# Altium PCB Transfomer_fully-interleaved-type2.PcbDoc (part 1 of 2)
Units mm, origin at the board's own origin, x right, y up, seen from the top; angles counter-clockwise.
Board outline 177 x 117 mm, 6 copper layers (Top Layer, Mid-Layer 1, Mid-Layer 2, Mid-Layer 3, Mid-Layer 4, Bottom Layer); 9 components, 18 nets, 68 pads, 510 vias.
Unrouted connection lines stored in the file: 8.
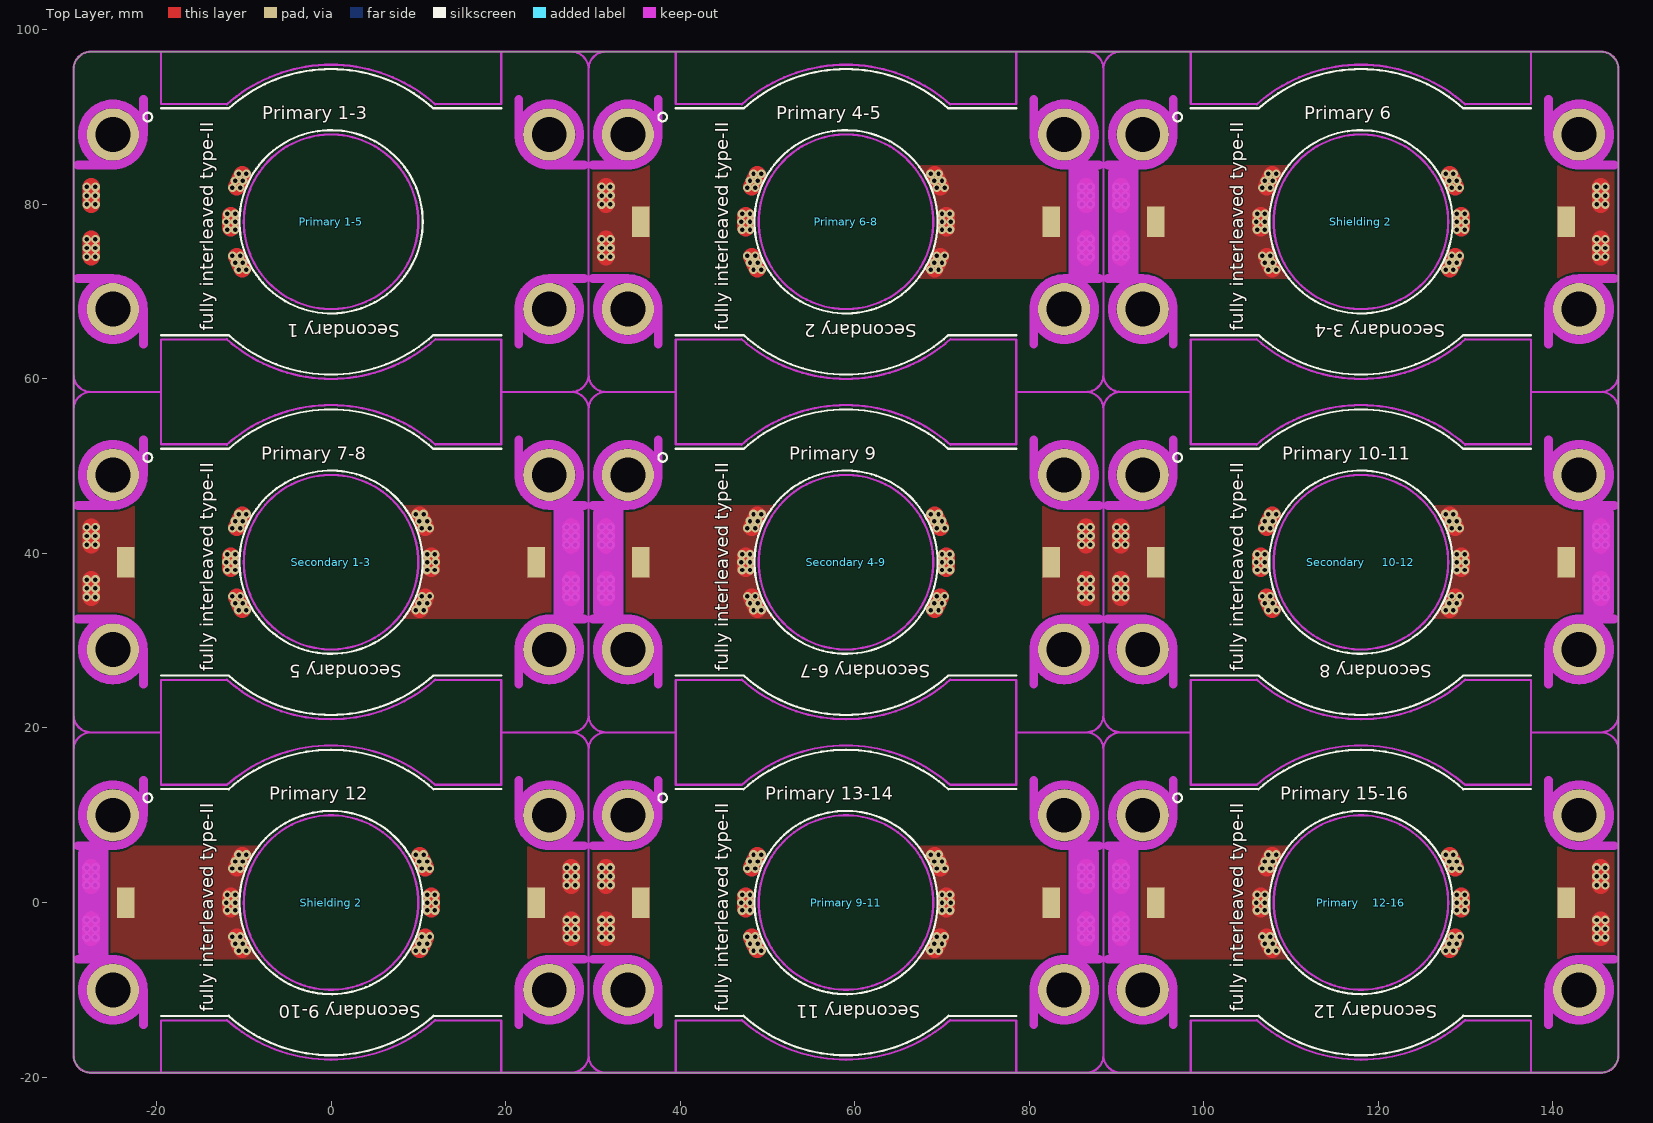
[diagram p0: Top Layer view]
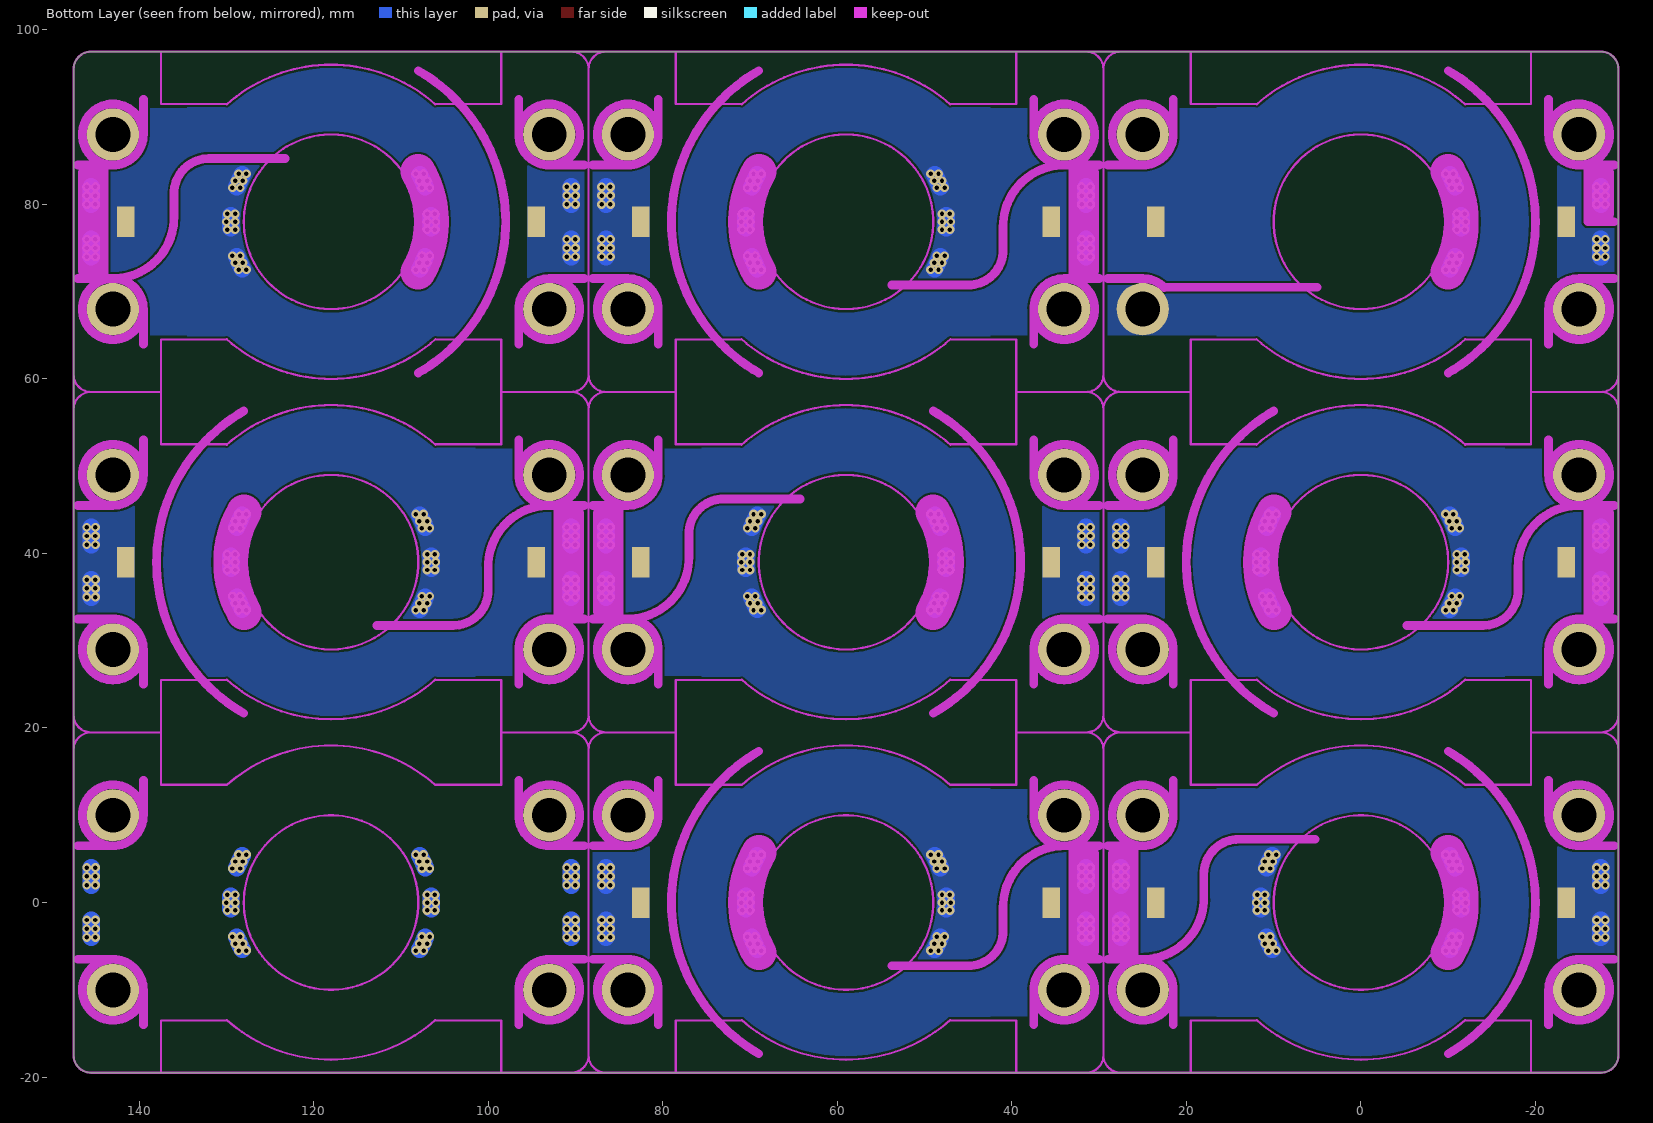
[diagram p1: Bottom Layer view, seen from below]
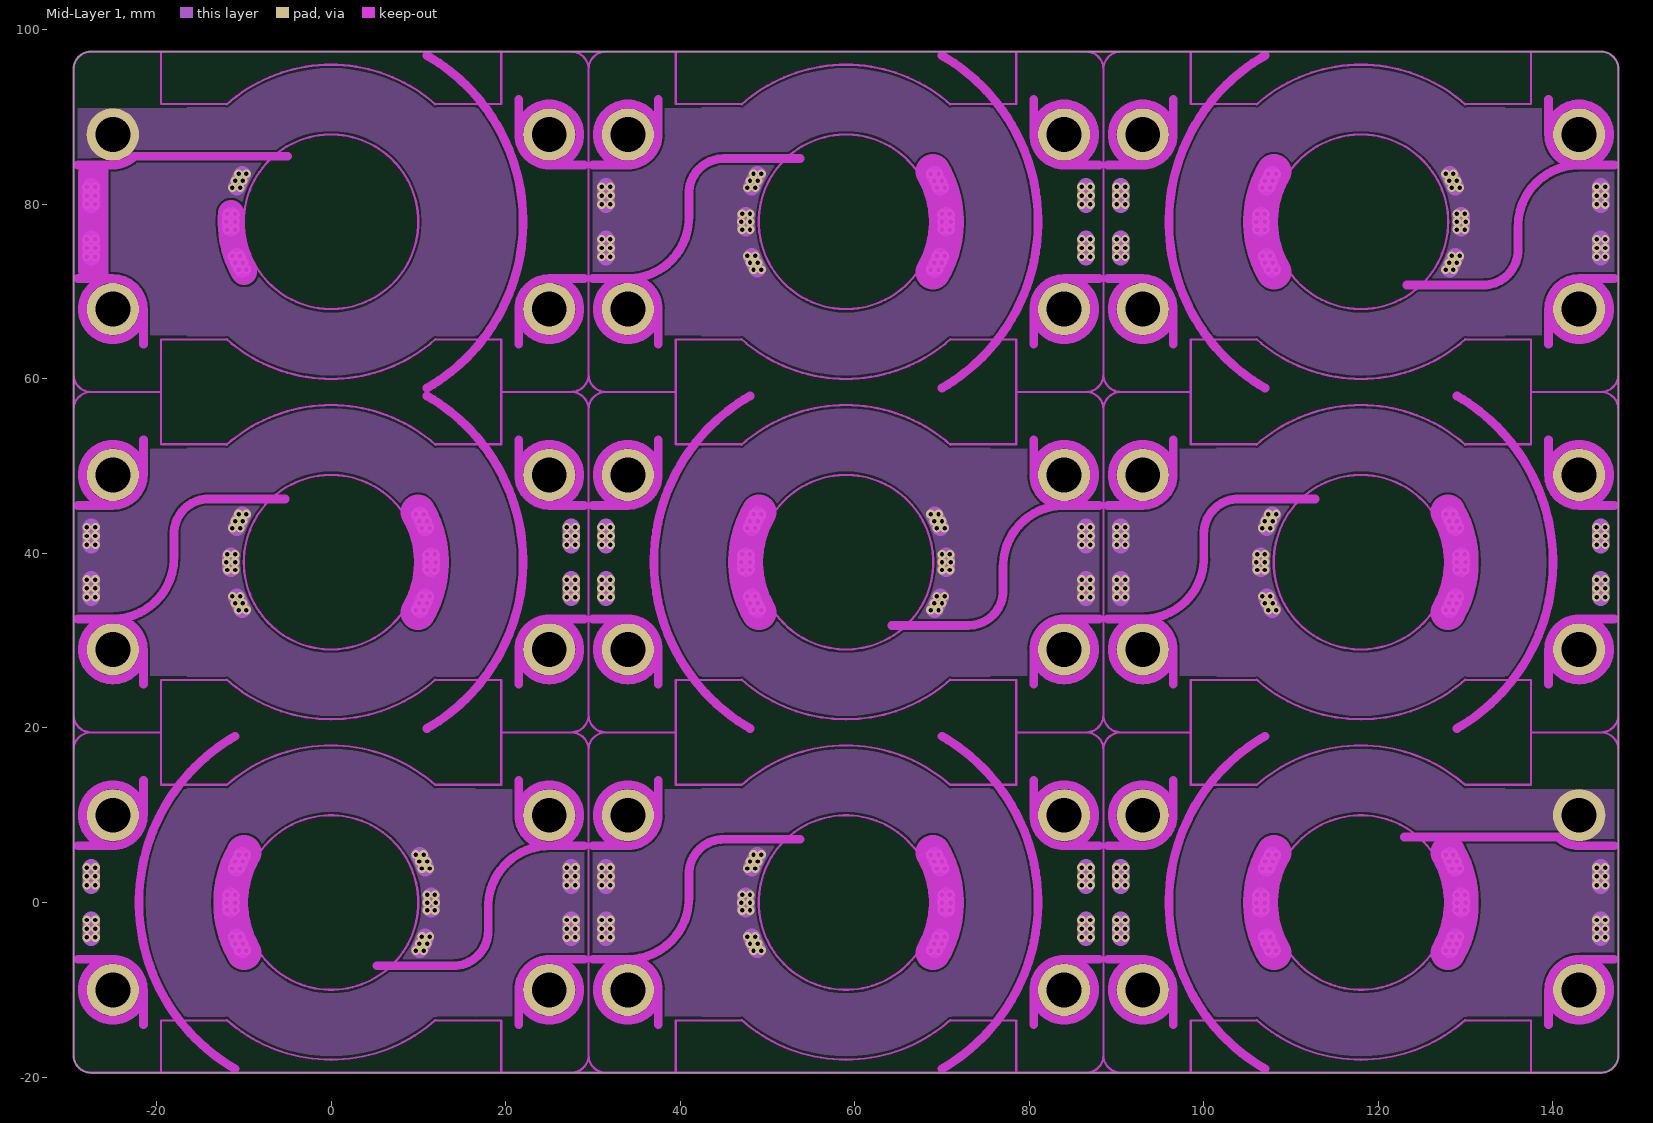
[diagram p2: Mid-Layer 1]
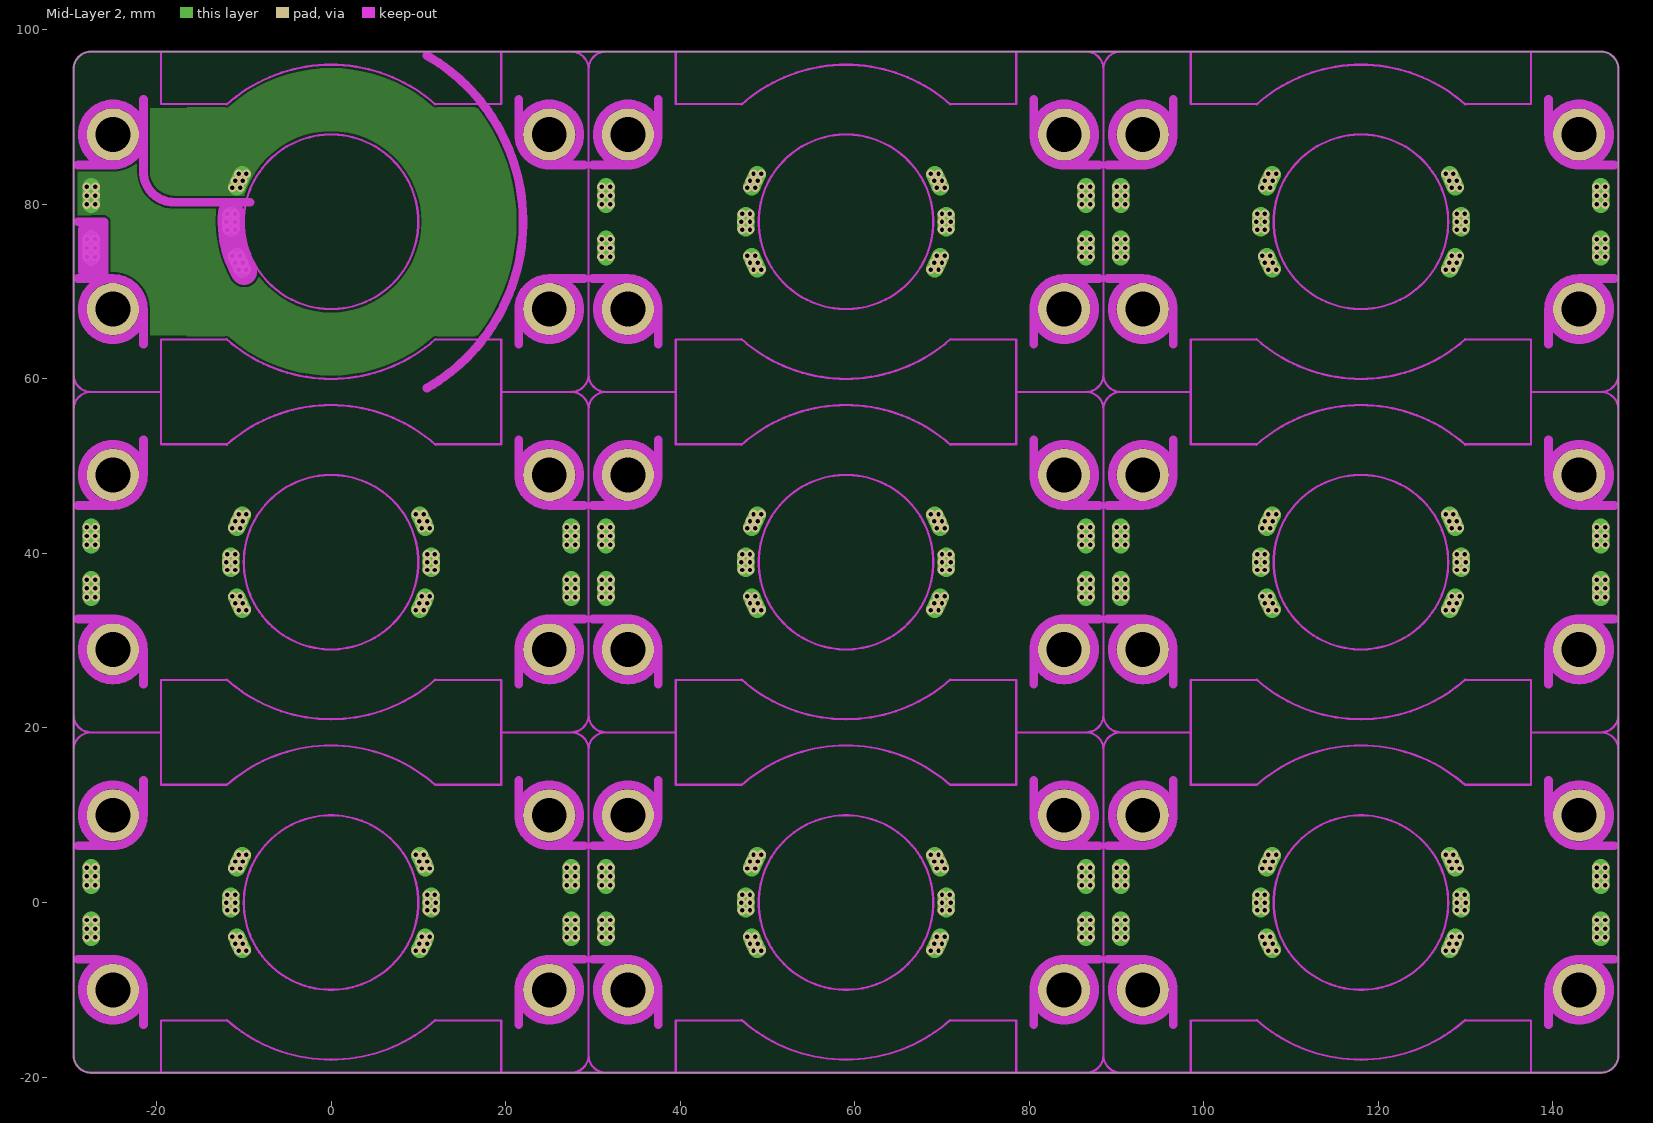
[diagram p3: Mid-Layer 2]
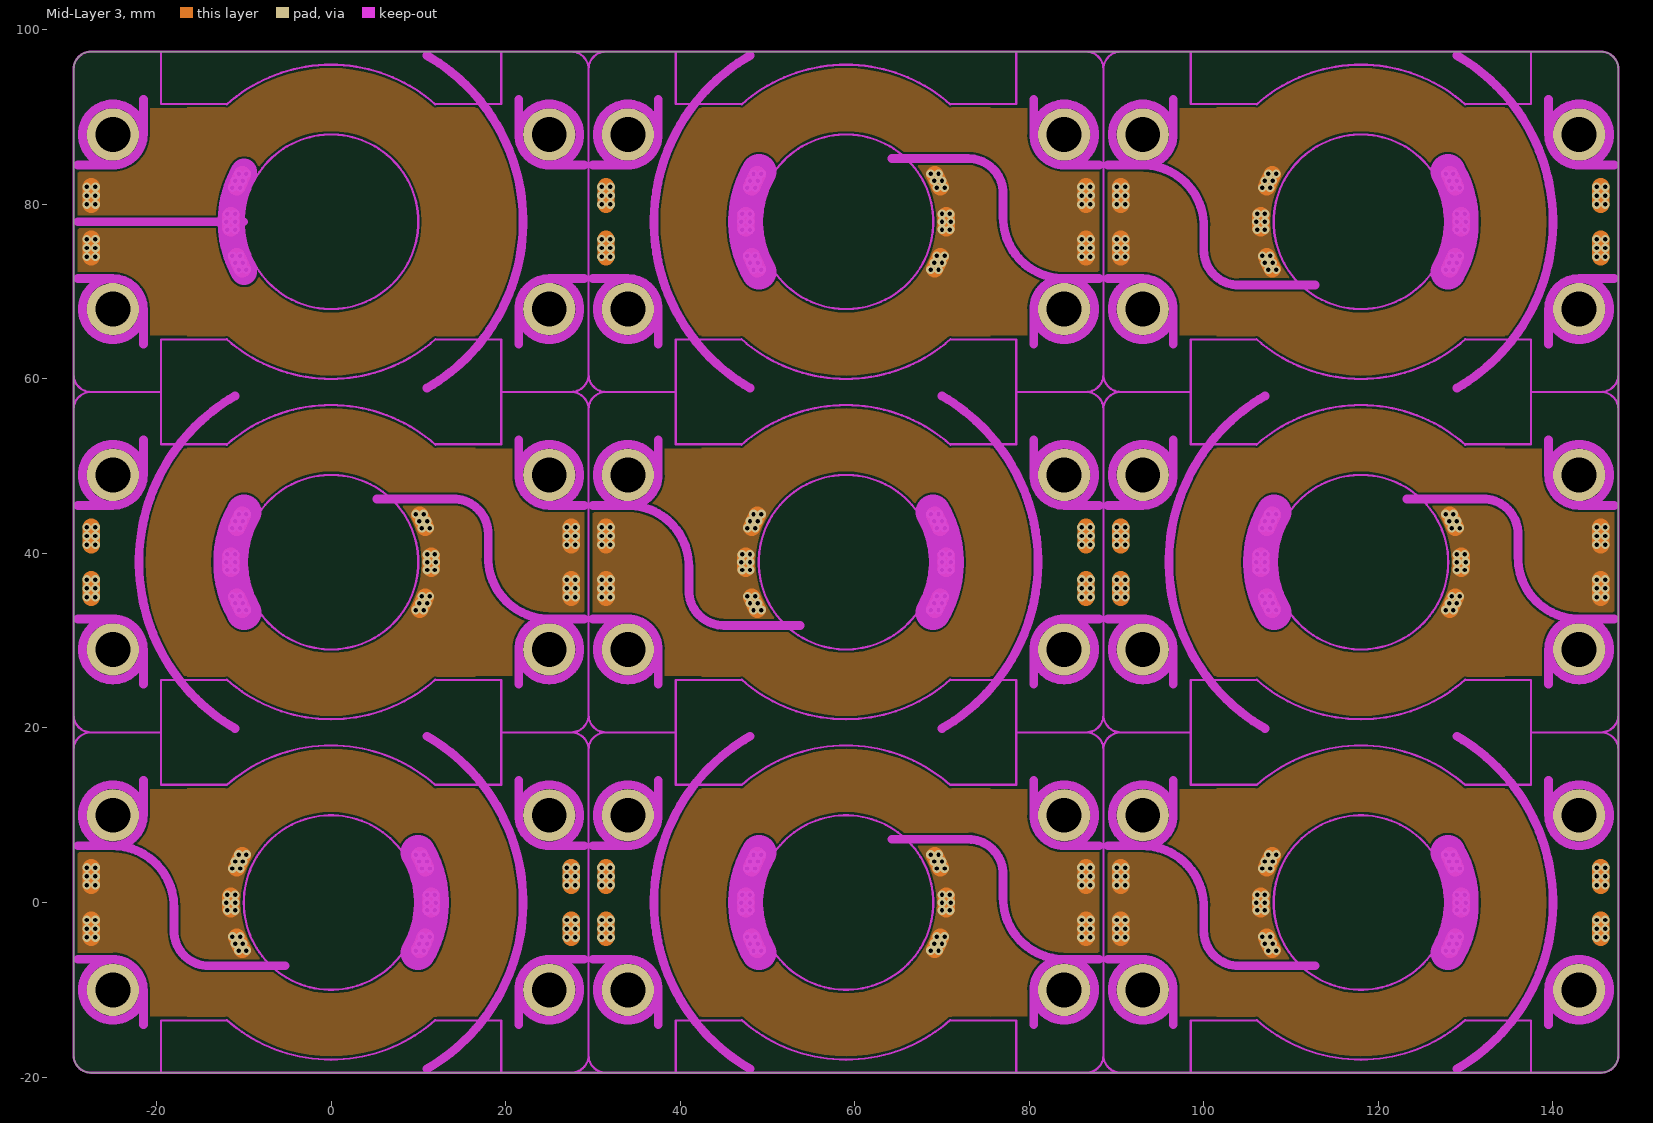
[diagram p4: Mid-Layer 3]
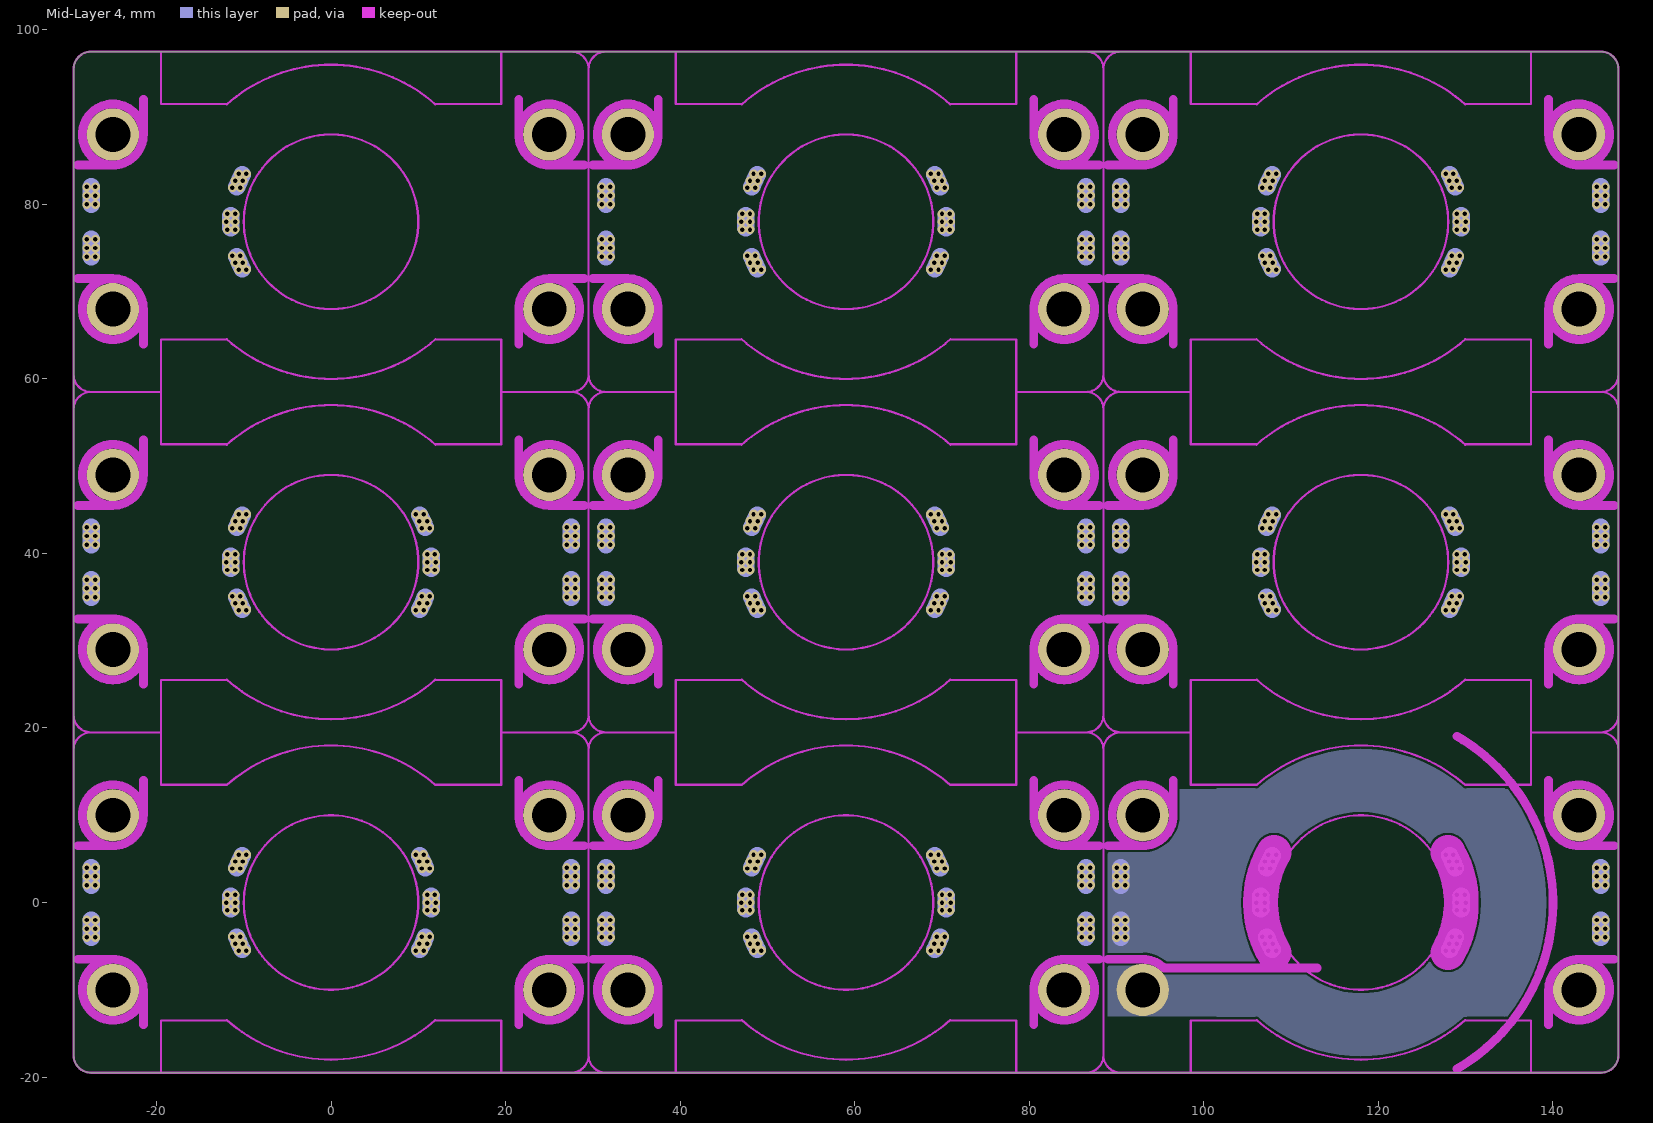
[diagram p5: Mid-Layer 4]

## Layer stack, top to bottom
Top Solder: solder mask 0.0102, Solder Resist, Dk 3.5
Top Layer: signal copper 0.0356
Dielectric 1: dielectric 0.32, FR-4, Dk 4.8
Mid-Layer 1: signal copper 0.0356
Dielectric3: dielectric 0.32, FR-4, Dk 4.8
Mid-Layer 2: signal copper 0.0356
Dielectric4: dielectric 0.32, FR-4, Dk 4.8
Mid-Layer 3: signal copper 0.0356
Dielectric2: dielectric 0.32, FR-4, Dk 4.8
Mid-Layer 4: signal copper 0.0356
Dielectric5: dielectric 0.32, FR-4, Dk 4.8
Bottom Layer: signal copper 0.0356
Bottom Solder: solder mask 0.0102, Solder Resist, Dk 3.5

## Board outline
-27.5,-19.5 cw(c-27.5,-17.5) -29.5,-17.5 -29.5,95.5 cw(c-27.5,95.5) -27.5,97.5 145.5,97.5 cw(c145.5,95.5) 147.5,95.5 147.5,-17.5 cw(c145.5,-17.5) 145.5,-19.5

## Design rules (kind name [scope] priority, off if disabled: settings)
Clearance [All] p1: gap=0.254 ignorepadtopadclearanceinfootprint=TRUE except(0: Arc-Hole Track-Hole SMDPad-Hole THPad-Hole Via-Hole Fill-Hole Poly-Hole Region-Hole Text-Hole)
ComponentClearance [All] p1: gap=0 collisioncheckmode=3 verticalgap=0 showdistances=FALSE
PlaneConnect [All] p1: planeconnectstyle=Direct reliefexpansion=0.508 reliefentries=4 reliefconductorwidth=0.254 reliefairgap=0.254
PolygonConnect [All] p1: connectstyle=Direct reliefconductorwidth=0.254 reliefentries=4 polygonreliefangle="90 Angle" airgapwidth=0.254
RoutingVias [All] p1: holewidth=0.508 width=1.016 viastyle="Through Hole" minholewidth=0.381 minwidth=0.762 maxholewidth=0.508 maxwidth=1.016
SolderMaskExpansion [All] p1: expansion=0.102 istentingtop=FALSE
Width [All] p1: maxlimit=8 minlimit=0.254 preferedwidth=4 minimp=50.000000 maximp=50.000000 favimp=50.000000
28 further rules are at their usual default settings.

## Components (designator, comment, footprint, x,y, rotation, side; value= is the part's Value field where it differs from the comment)
"Primary 1-5" "Comment" "EQ40/20 CORE" 0,78 r270 top locked
"Primary 6-8" "Comment" "EQ40/20 CORE" 59,78 r270 top locked
"Primary 9-11" "Comment" "EQ40/20 CORE" 59,0 r270 top locked
"Primary    12-16" "Comment" "EQ40/20 CORE" 118,0 r270 top locked
"Secondary 1-3" "Comment" "EQ40/20 CORE" 0,39 r270 top locked
"Secondary 4-9" "Comment" "EQ40/20 CORE" 59,39 r270 top locked
"Secondary     10-12" "Comment" "EQ40/20 CORE" 118,39 r270 top locked
"Shielding 2" "Comment" "EQ40/20 CORE" 0,0 r270 top locked
"Shielding 2" "Comment" "EQ40/20 CORE" 118,78 r270 top locked

## Footprints (in the part's own frame and the unit in brackets; to place one, negate y for a bottom-side part, rotate by r counter-clockwise, add the part's x,y. Pads: shape width x height; smd on the part's side, far side on the other; paste and mask are expansions set on the pad)
"EQ40/20 CORE" [mm]
  round 6 hole 4: 1(-10,-25) 3(10,-25) 6(10,25) 8(-10,25)
  Keep-Out Layer circle w0.254: c0,0 r10
  Keep-Out Layer lines w0.254: 19.5,-19.5 13.5,-19.5 13.5,-12 ; -19.5,-19.5 -13.5,-19.5 -13.5,-12 ; 13.453,-11.959 ccw(c0,0) 13.453,11.959 ; -13.453,-11.959 cw(c0,0) -13.453,11.959 ; 13.5,12 13.5,19.5 19.5,19.5 ; -13.5,12 -13.5,19.5 -19.5,19.5
  silkscreen extent -17.5,-21.5 17.5,19.5

## Free pads (board coordinates)
  rect 2x3.5 smd far side: 2(-23.5,0) 2(-23.5,39) 2(-23.5,78) 2(23.5,0) 2(23.5,39) 2(23.5,78) 2(35.5,0) 2(35.5,39) 2(35.5,78) 2(82.5,0) 2(82.5,39) 2(82.5,78) 2(94.5,39) 2(94.5,78) 2(141.5,39) 2(141.5,78)
  rect 2x3.5 smd: 2(-23.5,0) 2(-23.5,39) 2(23.5,0) 2(23.5,39) 2(35.5,0) 2(35.5,39) 2(35.5,78) 2(82.5,0) 2(82.5,39) 2(82.5,78) 2(94.5,39) 2(94.5,78) 2(94.5,0) 2(141.5,39) 2(141.5,78) 2(141.5,0)

## Via types
v1: diameter 1.016, hole 0.508, Top Layer to Bottom Layer, 510 vias

## Nets (pads, with @x,y where several pads share a name; then routed paths per layer and width w, separated by ;. In a path a pad name is that pad's centre, name@x,y a point inside that pad or via, vN(x,y) a via of type N, cw(c..) or ccw(c..) an arc to the next point about the centre after c; other vN are vias at no path point)
T1P: "Primary 1-5.1" pad.2@-23.5,78 | length 50.7
  Top Layer w2: v1@-27.5,74 v1@-27.5,76 ; v1@-27.5,80 v1@-27.5,82 ; v1@-11.479,77.298 cw(c0,78) v1@-11.479,78.702 ; v1@-10.784,74.006 ccw(c0,78) v1@-10.164,72.619 ; v1@-10.784,81.994 cw(c0,78) v1@-10.164,83.381
  Mid-Layer 1 w2: v1@-27.5,74 v1@-27.5,76 ; v1@-27.5,80 v1@-27.5,82 ; v1@-11.479,77.298 cw(c0,78) v1@-11.479,78.702 ; v1@-10.784,74.006 ccw(c0,78) v1@-10.164,72.619 ; v1@-10.784,81.994 cw(c0,78) v1@-10.164,83.381
  Mid-Layer 2 w2: v1@-27.5,74 v1@-27.5,76 ; v1@-27.5,80 v1@-27.5,82 ; v1@-11.479,77.298 cw(c0,78) v1@-11.479,78.702 ; v1@-10.784,74.006 ccw(c0,78) v1@-10.164,72.619 ; v1@-10.784,81.994 cw(c0,78) v1@-10.164,83.381
  Mid-Layer 3 w2: v1@-27.5,74 v1@-27.5,76 ; v1@-27.5,80 v1@-27.5,82 ; v1@-11.479,77.298 cw(c0,78) v1@-11.479,78.702 ; v1@-10.784,74.006 ccw(c0,78) v1@-10.164,72.619 ; v1@-10.784,81.994 cw(c0,78) v1@-10.164,83.381
  Mid-Layer 4 w2: v1@-27.5,74 v1@-27.5,76 ; v1@-27.5,80 v1@-27.5,82 ; v1@-11.479,77.298 cw(c0,78) v1@-11.479,78.702 ; v1@-10.784,74.006 ccw(c0,78) v1@-10.164,72.619 ; v1@-10.784,81.994 cw(c0,78) v1@-10.164,83.381
  Bottom Layer w2: v1@-27.5,74 v1@-27.5,76 ; v1@-27.5,80 v1@-27.5,82 ; v1@-11.479,77.298 cw(c0,78) v1@-11.479,78.702 ; v1@-10.784,74.006 ccw(c0,78) v1@-10.164,72.619 ; v1@-10.784,81.994 cw(c0,78) v1@-10.164,83.381
  other v1: -10.6,72.5 -9.7,72.5 -11,73.3 -10.1,73.3 -28,74 -27,74 -11.3,74.1 -10.4,74.1 -28,75 -27,75 -28,76 -27,76 -11.9,77.1 -11,77.1 -12,78 -11,78 -11.9,78.9 -11,78.9 -28,80 -27,80 -28,81 -27,81 -11.3,81.9 -10.4,81.9 -28,82 -27,82 -11,82.7 -10.1,82.7 -10.6,83.5 -9.7,83.5
T1S: "Primary 1-5.6" pad.2@23.5,78
T2P: pad.2@35.5,78 | length 50.7
  Top Layer w2: v1@31.5,74 v1@31.5,76 ; v1@31.5,80 v1@31.5,82 ; v1@47.521,77.298 cw(c59,78) v1@47.521,78.702 ; v1@48.216,74.006 ccw(c59,78) v1@48.836,72.619 ; v1@48.216,81.994 cw(c59,78) v1@48.836,83.381
  Mid-Layer 1 w2: v1@31.5,74 v1@31.5,76 ; v1@31.5,80 v1@31.5,82 ; v1@47.521,77.298 cw(c59,78) v1@47.521,78.702 ; v1@48.216,74.006 ccw(c59,78) v1@48.836,72.619 ; v1@48.216,81.994 cw(c59,78) v1@48.836,83.381
  Mid-Layer 2 w2: v1@31.5,74 v1@31.5,76 ; v1@31.5,80 v1@31.5,82 ; v1@47.521,77.298 cw(c59,78) v1@47.521,78.702 ; v1@48.216,74.006 ccw(c59,78) v1@48.836,72.619 ; v1@48.216,81.994 cw(c59,78) v1@48.836,83.381
  Mid-Layer 3 w2: v1@31.5,74 v1@31.5,76 ; v1@31.5,80 v1@31.5,82 ; v1@47.521,77.298 cw(c59,78) v1@47.521,78.702 ; v1@48.216,74.006 ccw(c59,78) v1@48.836,72.619 ; v1@48.216,81.994 cw(c59,78) v1@48.836,83.381
  Mid-Layer 4 w2: v1@31.5,74 v1@31.5,76 ; v1@31.5,80 v1@31.5,82 ; v1@47.521,77.298 cw(c59,78) v1@47.521,78.702 ; v1@48.216,74.006 ccw(c59,78) v1@48.836,72.619 ; v1@48.216,81.994 cw(c59,78) v1@48.836,83.381
  Bottom Layer w2: v1@31.5,74 v1@31.5,76 ; v1@31.5,80 v1@31.5,82 ; v1@47.521,77.298 cw(c59,78) v1@47.521,78.702 ; v1@48.216,74.006 ccw(c59,78) v1@48.836,72.619 ; v1@48.216,81.994 cw(c59,78) v1@48.836,83.381
  other v1: 48.4,72.5 49.3,72.5 48,73.3 48.9,73.3 31,74 32,74 47.7,74.1 48.6,74.1 31,75 32,75 31,76 32,76 47.1,77.1 48,77.1 47,78 48,78 47.1,78.9 48,78.9 31,80 32,80 31,81 32,81 47.7,81.9 48.6,81.9 31,82 32,82 48,82.7 48.9,82.7 48.4,83.5 49.3,83.5
T2S: pad.2@82.5,78 | length 50.7
  Top Layer w2: v1@69.164,72.619 ccw(c59,78) v1@69.784,74.006 ; v1@69.164,83.381 cw(c59,78) v1@69.784,81.994 ; v1@70.479,77.298 ccw(c59,78) v1@70.479,78.702 ; v1@86.5,74 v1@86.5,76 ; v1@86.5,80 v1@86.5,82
  Mid-Layer 1 w2: v1@69.164,72.619 ccw(c59,78) v1@69.784,74.006 ; v1@69.164,83.381 cw(c59,78) v1@69.784,81.994 ; v1@70.479,77.298 ccw(c59,78) v1@70.479,78.702 ; v1@86.5,74 v1@86.5,76 ; v1@86.5,80 v1@86.5,82
  Mid-Layer 2 w2: v1@69.164,72.619 ccw(c59,78) v1@69.784,74.006 ; v1@69.164,83.381 cw(c59,78) v1@69.784,81.994 ; v1@70.479,77.298 ccw(c59,78) v1@70.479,78.702 ; v1@86.5,74 v1@86.5,76 ; v1@86.5,80 v1@86.5,82
  Mid-Layer 3 w2: v1@69.164,72.619 ccw(c59,78) v1@69.784,74.006 ; v1@69.164,83.381 cw(c59,78) v1@69.784,81.994 ; v1@70.479,77.298 ccw(c59,78) v1@70.479,78.702 ; v1@86.5,74 v1@86.5,76 ; v1@86.5,80 v1@86.5,82
  Mid-Layer 4 w2: v1@69.164,72.619 ccw(c59,78) v1@69.784,74.006 ; v1@69.164,83.381 cw(c59,78) v1@69.784,81.994 ; v1@70.479,77.298 ccw(c59,78) v1@70.479,78.702 ; v1@86.5,74 v1@86.5,76 ; v1@86.5,80 v1@86.5,82
  Bottom Layer w2: v1@69.164,72.619 ccw(c59,78) v1@69.784,74.006 ; v1@69.164,83.381 cw(c59,78) v1@69.784,81.994 ; v1@70.479,77.298 ccw(c59,78) v1@70.479,78.702 ; v1@86.5,74 v1@86.5,76 ; v1@86.5,80 v1@86.5,82
  other v1: 68.7,72.5 69.6,72.5 69.1,73.3 70,73.3 86,74 87,74 69.4,74.1 70.3,74.1 86,75 87,75 86,76 87,76 70,77.1 70.9,77.1 70,78 71,78 70,78.9 70.9,78.9 86,80 87,80 86,81 87,81 69.4,81.9 70.3,81.9 86,82 87,82 69.1,82.7 70,82.7 68.7,83.5 69.6,83.5
T3P: pad.2@94.5,78 | length 50.7
  Top Layer w2: v1@90.5,74 v1@90.5,76 ; v1@90.5,80 v1@90.5,82 ; v1@106.521,77.298 cw(c118,78) v1@106.521,78.702 ; v1@107.216,74.006 ccw(c118,78) v1@107.836,72.619 ; v1@107.216,81.994 cw(c118,78) v1@107.836,83.381
  Mid-Layer 1 w2: v1@90.5,74 v1@90.5,76 ; v1@90.5,80 v1@90.5,82 ; v1@106.521,77.298 cw(c118,78) v1@106.521,78.702 ; v1@107.216,74.006 ccw(c118,78) v1@107.836,72.619 ; v1@107.216,81.994 cw(c118,78) v1@107.836,83.381
  Mid-Layer 2 w2: v1@90.5,74 v1@90.5,76 ; v1@90.5,80 v1@90.5,82 ; v1@106.521,77.298 cw(c118,78) v1@106.521,78.702 ; v1@107.216,74.006 ccw(c118,78) v1@107.836,72.619 ; v1@107.216,81.994 cw(c118,78) v1@107.836,83.381
  Mid-Layer 3 w2: v1@90.5,74 v1@90.5,76 ; v1@90.5,80 v1@90.5,82 ; v1@106.521,77.298 cw(c118,78) v1@106.521,78.702 ; v1@107.216,74.006 ccw(c118,78) v1@107.836,72.619 ; v1@107.216,81.994 cw(c118,78) v1@107.836,83.381
  Mid-Layer 4 w2: v1@90.5,74 v1@90.5,76 ; v1@90.5,80 v1@90.5,82 ; v1@106.521,77.298 cw(c118,78) v1@106.521,78.702 ; v1@107.216,74.006 ccw(c118,78) v1@107.836,72.619 ; v1@107.216,81.994 cw(c118,78) v1@107.836,83.381
  Bottom Layer w2: v1@90.5,74 v1@90.5,76 ; v1@90.5,80 v1@90.5,82 ; v1@106.521,77.298 cw(c118,78) v1@106.521,78.702 ; v1@107.216,74.006 ccw(c118,78) v1@107.836,72.619 ; v1@107.216,81.994 cw(c118,78) v1@107.836,83.381
  other v1: 107.4,72.5 108.3,72.5 107,73.3 107.9,73.3 90,74 91,74 106.7,74.1 107.6,74.1 90,75 91,75 90,76 91,76 106.1,77.1 107,77.1 106,78 107,78 106.1,78.9 107,78.9 90,80 91,80 90,81 91,81 106.7,81.9 107.6,81.9 90,82 91,82 107,82.7 107.9,82.7 107.4,83.5 108.3,83.5
T3S: pad.2@141.5,78 | length 50.7
  Top Layer w2: v1@128.164,72.619 ccw(c118,78) v1@128.784,74.006 ; v1@128.164,83.381 cw(c118,78) v1@128.784,81.994 ; v1@129.479,77.298 ccw(c118,78) v1@129.479,78.702 ; v1@145.5,74 v1@145.5,76 ; v1@145.5,80 v1@145.5,82
  Mid-Layer 1 w2: v1@128.164,72.619 ccw(c118,78) v1@128.784,74.006 ; v1@128.164,83.381 cw(c118,78) v1@128.784,81.994 ; v1@129.479,77.298 ccw(c118,78) v1@129.479,78.702 ; v1@145.5,74 v1@145.5,76 ; v1@145.5,80 v1@145.5,82
  Mid-Layer 2 w2: v1@128.164,72.619 ccw(c118,78) v1@128.784,74.006 ; v1@128.164,83.381 cw(c118,78) v1@128.784,81.994 ; v1@129.479,77.298 ccw(c118,78) v1@129.479,78.702 ; v1@145.5,74 v1@145.5,76 ; v1@145.5,80 v1@145.5,82
  Mid-Layer 3 w2: v1@128.164,72.619 ccw(c118,78) v1@128.784,74.006 ; v1@128.164,83.381 cw(c118,78) v1@128.784,81.994 ; v1@129.479,77.298 ccw(c118,78) v1@129.479,78.702 ; v1@145.5,74 v1@145.5,76 ; v1@145.5,80 v1@145.5,82
  Mid-Layer 4 w2: v1@128.164,72.619 ccw(c118,78) v1@128.784,74.006 ; v1@128.164,83.381 cw(c118,78) v1@128.784,81.994 ; v1@129.479,77.298 ccw(c118,78) v1@129.479,78.702 ; v1@145.5,74 v1@145.5,76 ; v1@145.5,80 v1@145.5,82
  Bottom Layer w2: v1@128.164,72.619 ccw(c118,78) v1@128.784,74.006 ; v1@128.164,83.381 cw(c118,78) v1@128.784,81.994 ; v1@129.479,77.298 ccw(c118,78) v1@129.479,78.702 ; v1@145.5,74 v1@145.5,76 ; v1@145.5,80 v1@145.5,82
  other v1: 127.7,72.5 128.6,72.5 128.1,73.3 129,73.3 145,74 146,74 128.4,74.1 129.3,74.1 145,75 146,75 145,76 146,76 129,77.1 129.9,77.1 129,78 130,78 129,78.9 129.9,78.9 145,80 146,80 145,81 146,81 128.4,81.9 129.3,81.9 145,82 146,82 128.1,82.7 129,82.7 127.7,83.5 128.6,83.5
T4P: pad.2@-23.5,39 | length 50.7
  Top Layer w2: v1@-27.5,35 v1@-27.5,37 ; v1@-27.5,41 v1@-27.5,43 ; v1@-11.479,38.298 cw(c0,39) v1@-11.479,39.702 ; v1@-10.784,35.006 ccw(c0,39) v1@-10.164,33.619 ; v1@-10.784,42.994 cw(c0,39) v1@-10.164,44.381
  Mid-Layer 1 w2: v1@-27.5,35 v1@-27.5,37 ; v1@-27.5,41 v1@-27.5,43 ; v1@-11.479,38.298 cw(c0,39) v1@-11.479,39.702 ; v1@-10.784,35.006 ccw(c0,39) v1@-10.164,33.619 ; v1@-10.784,42.994 cw(c0,39) v1@-10.164,44.381
  Mid-Layer 2 w2: v1@-27.5,35 v1@-27.5,37 ; v1@-27.5,41 v1@-27.5,43 ; v1@-11.479,38.298 cw(c0,39) v1@-11.479,39.702 ; v1@-10.784,35.006 ccw(c0,39) v1@-10.164,33.619 ; v1@-10.784,42.994 cw(c0,39) v1@-10.164,44.381
  Mid-Layer 3 w2: v1@-27.5,35 v1@-27.5,37 ; v1@-27.5,41 v1@-27.5,43 ; v1@-11.479,38.298 cw(c0,39) v1@-11.479,39.702 ; v1@-10.784,35.006 ccw(c0,39) v1@-10.164,33.619 ; v1@-10.784,42.994 cw(c0,39) v1@-10.164,44.381
  Mid-Layer 4 w2: v1@-27.5,35 v1@-27.5,37 ; v1@-27.5,41 v1@-27.5,43 ; v1@-11.479,38.298 cw(c0,39) v1@-11.479,39.702 ; v1@-10.784,35.006 ccw(c0,39) v1@-10.164,33.619 ; v1@-10.784,42.994 cw(c0,39) v1@-10.164,44.381
  Bottom Layer w2: v1@-27.5,35 v1@-27.5,37 ; v1@-27.5,41 v1@-27.5,43 ; v1@-11.479,38.298 cw(c0,39) v1@-11.479,39.702 ; v1@-10.784,35.006 ccw(c0,39) v1@-10.164,33.619 ; v1@-10.784,42.994 cw(c0,39) v1@-10.164,44.381
  other v1: -10.6,33.5 -9.7,33.5 -11,34.3 -10.1,34.3 -28,35 -27,35 -11.3,35.1 -10.4,35.1 -28,36 -27,36 -28,37 -27,37 -11.9,38.1 -11,38.1 -12,39 -11,39 -11.9,39.9 -11,39.9 -28,41 -27,41 -28,42 -27,42 -11.3,42.9 -10.4,42.9 -28,43 -27,43 -11,43.7 -10.1,43.7 -10.6,44.5 -9.7,44.5
T4S: pad.2@23.5,39 | length 50.7
  Top Layer w2: v1@10.164,33.619 ccw(c0,39) v1@10.784,35.006 ; v1@10.164,44.381 cw(c0,39) v1@10.784,42.994 ; v1@11.479,38.298 ccw(c0,39) v1@11.479,39.702 ; v1@27.5,35 v1@27.5,37 ; v1@27.5,41 v1@27.5,43
  Mid-Layer 1 w2: v1@10.164,33.619 ccw(c0,39) v1@10.784,35.006 ; v1@10.164,44.381 cw(c0,39) v1@10.784,42.994 ; v1@11.479,38.298 ccw(c0,39) v1@11.479,39.702 ; v1@27.5,35 v1@27.5,37 ; v1@27.5,41 v1@27.5,43
  Mid-Layer 2 w2: v1@10.164,33.619 ccw(c0,39) v1@10.784,35.006 ; v1@10.164,44.381 cw(c0,39) v1@10.784,42.994 ; v1@11.479,38.298 ccw(c0,39) v1@11.479,39.702 ; v1@27.5,35 v1@27.5,37 ; v1@27.5,41 v1@27.5,43
  Mid-Layer 3 w2: v1@10.164,33.619 ccw(c0,39) v1@10.784,35.006 ; v1@10.164,44.381 cw(c0,39) v1@10.784,42.994 ; v1@11.479,38.298 ccw(c0,39) v1@11.479,39.702 ; v1@27.5,35 v1@27.5,37 ; v1@27.5,41 v1@27.5,43
  Mid-Layer 4 w2: v1@10.164,33.619 ccw(c0,39) v1@10.784,35.006 ; v1@10.164,44.381 cw(c0,39) v1@10.784,42.994 ; v1@11.479,38.298 ccw(c0,39) v1@11.479,39.702 ; v1@27.5,35 v1@27.5,37 ; v1@27.5,41 v1@27.5,43
  Bottom Layer w2: v1@10.164,33.619 ccw(c0,39) v1@10.784,35.006 ; v1@10.164,44.381 cw(c0,39) v1@10.784,42.994 ; v1@11.479,38.298 ccw(c0,39) v1@11.479,39.702 ; v1@27.5,35 v1@27.5,37 ; v1@27.5,41 v1@27.5,43
  other v1: 9.7,33.5 10.6,33.5 10.1,34.3 11,34.3 27,35 28,35 10.4,35.1 11.3,35.1 27,36 28,36 27,37 28,37 11,38.1 11.9,38.1 11,39 12,39 11,39.9 11.9,39.9 27,41 28,41 27,42 28,42 10.4,42.9 11.3,42.9 27,43 28,43 10.1,43.7 11,43.7 9.7,44.5 10.6,44.5
T5P: pad.2@35.5,39 | length 50.7
  Top Layer w2: v1@31.5,35 v1@31.5,37 ; v1@31.5,41 v1@31.5,43 ; v1@47.521,38.298 cw(c59,39) v1@47.521,39.702 ; v1@48.216,35.006 ccw(c59,39) v1@48.836,33.619 ; v1@48.216,42.994 cw(c59,39) v1@48.836,44.381
  Mid-Layer 1 w2: v1@31.5,35 v1@31.5,37 ; v1@31.5,41 v1@31.5,43 ; v1@47.521,38.298 cw(c59,39) v1@47.521,39.702 ; v1@48.216,35.006 ccw(c59,39) v1@48.836,33.619 ; v1@48.216,42.994 cw(c59,39) v1@48.836,44.381
  Mid-Layer 2 w2: v1@31.5,35 v1@31.5,37 ; v1@31.5,41 v1@31.5,43 ; v1@47.521,38.298 cw(c59,39) v1@47.521,39.702 ; v1@48.216,35.006 ccw(c59,39) v1@48.836,33.619 ; v1@48.216,42.994 cw(c59,39) v1@48.836,44.381
  Mid-Layer 3 w2: v1@31.5,35 v1@31.5,37 ; v1@31.5,41 v1@31.5,43 ; v1@47.521,38.298 cw(c59,39) v1@47.521,39.702 ; v1@48.216,35.006 ccw(c59,39) v1@48.836,33.619 ; v1@48.216,42.994 cw(c59,39) v1@48.836,44.381
  Mid-Layer 4 w2: v1@31.5,35 v1@31.5,37 ; v1@31.5,41 v1@31.5,43 ; v1@47.521,38.298 cw(c59,39) v1@47.521,39.702 ; v1@48.216,35.006 ccw(c59,39) v1@48.836,33.619 ; v1@48.216,42.994 cw(c59,39) v1@48.836,44.381
  Bottom Layer w2: v1@31.5,35 v1@31.5,37 ; v1@31.5,41 v1@31.5,43 ; v1@47.521,38.298 cw(c59,39) v1@47.521,39.702 ; v1@48.216,35.006 ccw(c59,39) v1@48.836,33.619 ; v1@48.216,42.994 cw(c59,39) v1@48.836,44.381
  other v1: 48.4,33.5 49.3,33.5 48,34.3 48.9,34.3 31,35 32,35 47.7,35.1 48.6,35.1 31,36 32,36 31,37 32,37 47.1,38.1 48,38.1 47,39 48,39 47.1,39.9 48,39.9 31,41 32,41 31,42 32,42 47.7,42.9 48.6,42.9 31,43 32,43 48,43.7 48.9,43.7 48.4,44.5 49.3,44.5
T5S: pad.2@82.5,39 | length 50.7
  Top Layer w2: v1@69.164,33.619 ccw(c59,39) v1@69.784,35.006 ; v1@69.164,44.381 cw(c59,39) v1@69.784,42.994 ; v1@70.479,38.298 ccw(c59,39) v1@70.479,39.702 ; v1@86.5,35 v1@86.5,37 ; v1@86.5,41 v1@86.5,43
  Mid-Layer 1 w2: v1@69.164,33.619 ccw(c59,39) v1@69.784,35.006 ; v1@69.164,44.381 cw(c59,39) v1@69.784,42.994 ; v1@70.479,38.298 ccw(c59,39) v1@70.479,39.702 ; v1@86.5,35 v1@86.5,37 ; v1@86.5,41 v1@86.5,43
  Mid-Layer 2 w2: v1@69.164,33.619 ccw(c59,39) v1@69.784,35.006 ; v1@69.164,44.381 cw(c59,39) v1@69.784,42.994 ; v1@70.479,38.298 ccw(c59,39) v1@70.479,39.702 ; v1@86.5,35 v1@86.5,37 ; v1@86.5,41 v1@86.5,43
  Mid-Layer 3 w2: v1@69.164,33.619 ccw(c59,39) v1@69.784,35.006 ; v1@69.164,44.381 cw(c59,39) v1@69.784,42.994 ; v1@70.479,38.298 ccw(c59,39) v1@70.479,39.702 ; v1@86.5,35 v1@86.5,37 ; v1@86.5,41 v1@86.5,43
  Mid-Layer 4 w2: v1@69.164,33.619 ccw(c59,39) v1@69.784,35.006 ; v1@69.164,44.381 cw(c59,39) v1@69.784,42.994 ; v1@70.479,38.298 ccw(c59,39) v1@70.479,39.702 ; v1@86.5,35 v1@86.5,37 ; v1@86.5,41 v1@86.5,43
  Bottom Layer w2: v1@69.164,33.619 ccw(c59,39) v1@69.784,35.006 ; v1@69.164,44.381 cw(c59,39) v1@69.784,42.994 ; v1@70.479,38.298 ccw(c59,39) v1@70.479,39.702 ; v1@86.5,35 v1@86.5,37 ; v1@86.5,41 v1@86.5,43
  other v1: 68.7,33.5 69.6,33.5 69.1,34.3 70,34.3 86,35 87,35 69.4,35.1 70.3,35.1 86,36 87,36 86,37 87,37 70,38.1 70.9,38.1 70,39 71,39 70,39.9 70.9,39.9 86,41 87,41 86,42 87,42 69.4,42.9 70.3,42.9 86,43 87,43 69.1,43.7 70,43.7 68.7,44.5 69.6,44.5
T6P: pad.2@94.5,39 | length 50.7
  Top Layer w2: v1@90.5,35 v1@90.5,37 ; v1@90.5,41 v1@90.5,43 ; v1@106.521,38.298 cw(c118,39) v1@106.521,39.702 ; v1@107.216,35.006 ccw(c118,39) v1@107.836,33.619 ; v1@107.216,42.994 cw(c118,39) v1@107.836,44.381
  Mid-Layer 1 w2: v1@90.5,35 v1@90.5,37 ; v1@90.5,41 v1@90.5,43 ; v1@106.521,38.298 cw(c118,39) v1@106.521,39.702 ; v1@107.216,35.006 ccw(c118,39) v1@107.836,33.619 ; v1@107.216,42.994 cw(c118,39) v1@107.836,44.381
  Mid-Layer 2 w2: v1@90.5,35 v1@90.5,37 ; v1@90.5,41 v1@90.5,43 ; v1@106.521,38.298 cw(c118,39) v1@106.521,39.702 ; v1@107.216,35.006 ccw(c118,39) v1@107.836,33.619 ; v1@107.216,42.994 cw(c118,39) v1@107.836,44.381
  Mid-Layer 3 w2: v1@90.5,35 v1@90.5,37 ; v1@90.5,41 v1@90.5,43 ; v1@106.521,38.298 cw(c118,39) v1@106.521,39.702 ; v1@107.216,35.006 ccw(c118,39) v1@107.836,33.619 ; v1@107.216,42.994 cw(c118,39) v1@107.836,44.381
  Mid-Layer 4 w2: v1@90.5,35 v1@90.5,37 ; v1@90.5,41 v1@90.5,43 ; v1@106.521,38.298 cw(c118,39) v1@106.521,39.702 ; v1@107.216,35.006 ccw(c118,39) v1@107.836,33.619 ; v1@107.216,42.994 cw(c118,39) v1@107.836,44.381
  Bottom Layer w2: v1@90.5,35 v1@90.5,37 ; v1@90.5,41 v1@90.5,43 ; v1@106.521,38.298 cw(c118,39) v1@106.521,39.702 ; v1@107.216,35.006 ccw(c118,39) v1@107.836,33.619 ; v1@107.216,42.994 cw(c118,39) v1@107.836,44.381
  other v1: 107.4,33.5 108.3,33.5 107,34.3 107.9,34.3 90,35 91,35 106.7,35.1 107.6,35.1 90,36 91,36 90,37 91,37 106.1,38.1 107,38.1 106,39 107,39 106.1,39.9 107,39.9 90,41 91,41 90,42 91,42 106.7,42.9 107.6,42.9 90,43 91,43 107,43.7 107.9,43.7 107.4,44.5 108.3,44.5
T6S: pad.2@141.5,39 | length 50.7
  Top Layer w2: v1@128.164,33.619 ccw(c118,39) v1@128.784,35.006 ; v1@128.164,44.381 cw(c118,39) v1@128.784,42.994 ; v1@129.479,38.298 ccw(c118,39) v1@129.479,39.702 ; v1@145.5,35 v1@145.5,37 ; v1@145.5,41 v1@145.5,43
  Mid-Layer 1 w2: v1@128.164,33.619 ccw(c118,39) v1@128.784,35.006 ; v1@128.164,44.381 cw(c118,39) v1@128.784,42.994 ; v1@129.479,38.298 ccw(c118,39) v1@129.479,39.702 ; v1@145.5,35 v1@145.5,37 ; v1@145.5,41 v1@145.5,43
  Mid-Layer 2 w2: v1@128.164,33.619 ccw(c118,39) v1@128.784,35.006 ; v1@128.164,44.381 cw(c118,39) v1@128.784,42.994 ; v1@129.479,38.298 ccw(c118,39) v1@129.479,39.702 ; v1@145.5,35 v1@145.5,37 ; v1@145.5,41 v1@145.5,43
  Mid-Layer 3 w2: v1@128.164,33.619 ccw(c118,39) v1@128.784,35.006 ; v1@128.164,44.381 cw(c118,39) v1@128.784,42.994 ; v1@129.479,38.298 ccw(c118,39) v1@129.479,39.702 ; v1@145.5,35 v1@145.5,37 ; v1@145.5,41 v1@145.5,43
  Mid-Layer 4 w2: v1@128.164,33.619 ccw(c118,39) v1@128.784,35.006 ; v1@128.164,44.381 cw(c118,39) v1@128.784,42.994 ; v1@129.479,38.298 ccw(c118,39) v1@129.479,39.702 ; v1@145.5,35 v1@145.5,37 ; v1@145.5,41 v1@145.5,43
  Bottom Layer w2: v1@128.164,33.619 ccw(c118,39) v1@128.784,35.006 ; v1@128.164,44.381 cw(c118,39) v1@128.784,42.994 ; v1@129.479,38.298 ccw(c118,39) v1@129.479,39.702 ; v1@145.5,35 v1@145.5,37 ; v1@145.5,41 v1@145.5,43
  other v1: 127.7,33.5 128.6,33.5 128.1,34.3 129,34.3 145,35 146,35 128.4,35.1 129.3,35.1 145,36 146,36 145,37 146,37 129,38.1 129.9,38.1 129,39 130,39 129,39.9 129.9,39.9 145,41 146,41 145,42 146,42 128.4,42.9 129.3,42.9 145,43 146,43 128.1,43.7 129,43.7 127.7,44.5 128.6,44.5
T7P: pad.2@-23.5,0 | length 50.7
  Top Layer w2: v1@-27.5,-4 v1@-27.5,-2 ; v1@-27.5,2 v1@-27.5,4 ; v1@-11.479,-0.702 cw(c0,0) v1@-11.479,0.702 ; v1@-10.784,-3.994 ccw(c0,0) v1@-10.164,-5.381 ; v1@-10.784,3.994 cw(c0,0) v1@-10.164,5.381
  Mid-Layer 1 w2: v1@-27.5,-4 v1@-27.5,-2 ; v1@-27.5,2 v1@-27.5,4 ; v1@-11.479,-0.702 cw(c0,0) v1@-11.479,0.702 ; v1@-10.784,-3.994 ccw(c0,0) v1@-10.164,-5.381 ; v1@-10.784,3.994 cw(c0,0) v1@-10.164,5.381
  Mid-Layer 2 w2: v1@-27.5,-4 v1@-27.5,-2 ; v1@-27.5,2 v1@-27.5,4 ; v1@-11.479,-0.702 cw(c0,0) v1@-11.479,0.702 ; v1@-10.784,-3.994 ccw(c0,0) v1@-10.164,-5.381 ; v1@-10.784,3.994 cw(c0,0) v1@-10.164,5.381
  Mid-Layer 3 w2: v1@-27.5,-4 v1@-27.5,-2 ; v1@-27.5,2 v1@-27.5,4 ; v1@-11.479,-0.702 cw(c0,0) v1@-11.479,0.702 ; v1@-10.784,-3.994 ccw(c0,0) v1@-10.164,-5.381 ; v1@-10.784,3.994 cw(c0,0) v1@-10.164,5.381
  Mid-Layer 4 w2: v1@-27.5,-4 v1@-27.5,-2 ; v1@-27.5,2 v1@-27.5,4 ; v1@-11.479,-0.702 cw(c0,0) v1@-11.479,0.702 ; v1@-10.784,-3.994 ccw(c0,0) v1@-10.164,-5.381 ; v1@-10.784,3.994 cw(c0,0) v1@-10.164,5.381
  Bottom Layer w2: v1@-27.5,-4 v1@-27.5,-2 ; v1@-27.5,2 v1@-27.5,4 ; v1@-11.479,-0.702 cw(c0,0) v1@-11.479,0.702 ; v1@-10.784,-3.994 ccw(c0,0) v1@-10.164,-5.381 ; v1@-10.784,3.994 cw(c0,0) v1@-10.164,5.381
  other v1: -10.6,-5.5 -9.7,-5.5 -11,-4.7 -10.1,-4.7 -28,-4 -27,-4 -11.3,-3.9 -10.4,-3.9 -28,-3 -27,-3 -28,-2 -27,-2 -11.9,-0.9 -11,-0.9 -12,0 -11,0 -11.9,0.9 -11,0.9 -28,2 -27,2 -28,3 -27,3 -11.3,3.9 -10.4,3.9 -28,4 -27,4 -11,4.7 -10.1,4.7 -10.6,5.5 -9.7,5.5
T7S: pad.2@23.5,0 | length 50.7
  Top Layer w2: v1@10.164,-5.381 ccw(c0,0) v1@10.784,-3.994 ; v1@10.164,5.381 cw(c0,0) v1@10.784,3.994 ; v1@11.479,-0.702 ccw(c0,0) v1@11.479,0.702 ; v1@27.5,-4 v1@27.5,-2 ; v1@27.5,2 v1@27.5,4
  Mid-Layer 1 w2: v1@10.164,-5.381 ccw(c0,0) v1@10.784,-3.994 ; v1@10.164,5.381 cw(c0,0) v1@10.784,3.994 ; v1@11.479,-0.702 ccw(c0,0) v1@11.479,0.702 ; v1@27.5,-4 v1@27.5,-2 ; v1@27.5,2 v1@27.5,4
  Mid-Layer 2 w2: v1@10.164,-5.381 ccw(c0,0) v1@10.784,-3.994 ; v1@10.164,5.381 cw(c0,0) v1@10.784,3.994 ; v1@11.479,-0.702 ccw(c0,0) v1@11.479,0.702 ; v1@27.5,-4 v1@27.5,-2 ; v1@27.5,2 v1@27.5,4
  Mid-Layer 3 w2: v1@10.164,-5.381 ccw(c0,0) v1@10.784,-3.994 ; v1@10.164,5.381 cw(c0,0) v1@10.784,3.994 ; v1@11.479,-0.702 ccw(c0,0) v1@11.479,0.702 ; v1@27.5,-4 v1@27.5,-2 ; v1@27.5,2 v1@27.5,4
  Mid-Layer 4 w2: v1@10.164,-5.381 ccw(c0,0) v1@10.784,-3.994 ; v1@10.164,5.381 cw(c0,0) v1@10.784,3.994 ; v1@11.479,-0.702 ccw(c0,0) v1@11.479,0.702 ; v1@27.5,-4 v1@27.5,-2 ; v1@27.5,2 v1@27.5,4
  Bottom Layer w2: v1@10.164,-5.381 ccw(c0,0) v1@10.784,-3.994 ; v1@10.164,5.381 cw(c0,0) v1@10.784,3.994 ; v1@11.479,-0.702 ccw(c0,0) v1@11.479,0.702 ; v1@27.5,-4 v1@27.5,-2 ; v1@27.5,2 v1@27.5,4
  other v1: 9.7,-5.5 10.6,-5.5 10.1,-4.7 11,-4.7 27,-4 28,-4 10.4,-3.9 11.3,-3.9 27,-3 28,-3 27,-2 28,-2 11,-0.9 11.9,-0.9 11,0 12,0 11,0.9 11.9,0.9 27,2 28,2 27,3 28,3 10.4,3.9 11.3,3.9 27,4 28,4 10.1,4.7 11,4.7 9.7,5.5 10.6,5.5
T8P: pad.2@35.5,0 | length 50.7
  Top Layer w2: v1@31.5,-4 v1@31.5,-2 ; v1@31.5,2 v1@31.5,4 ; v1@47.521,-0.702 cw(c59,0) v1@47.521,0.702 ; v1@48.216,-3.994 ccw(c59,0) v1@48.836,-5.381 ; v1@48.216,3.994 cw(c59,0) v1@48.836,5.381
  Mid-Layer 1 w2: v1@31.5,-4 v1@31.5,-2 ; v1@31.5,2 v1@31.5,4 ; v1@47.521,-0.702 cw(c59,0) v1@47.521,0.702 ; v1@48.216,-3.994 ccw(c59,0) v1@48.836,-5.381 ; v1@48.216,3.994 cw(c59,0) v1@48.836,5.381
  Mid-Layer 2 w2: v1@31.5,-4 v1@31.5,-2 ; v1@31.5,2 v1@31.5,4 ; v1@47.521,-0.702 cw(c59,0) v1@47.521,0.702 ; v1@48.216,-3.994 ccw(c59,0) v1@48.836,-5.381 ; v1@48.216,3.994 cw(c59,0) v1@48.836,5.381
  Mid-Layer 3 w2: v1@31.5,-4 v1@31.5,-2 ; v1@31.5,2 v1@31.5,4 ; v1@47.521,-0.702 cw(c59,0) v1@47.521,0.702 ; v1@48.216,-3.994 ccw(c59,0) v1@48.836,-5.381 ; v1@48.216,3.994 cw(c59,0) v1@48.836,5.381
  Mid-Layer 4 w2: v1@31.5,-4 v1@31.5,-2 ; v1@31.5,2 v1@31.5,4 ; v1@47.521,-0.702 cw(c59,0) v1@47.521,0.702 ; v1@48.216,-3.994 ccw(c59,0) v1@48.836,-5.381 ; v1@48.216,3.994 cw(c59,0) v1@48.836,5.381
  Bottom Layer w2: v1@31.5,-4 v1@31.5,-2 ; v1@31.5,2 v1@31.5,4 ; v1@47.521,-0.702 cw(c59,0) v1@47.521,0.702 ; v1@48.216,-3.994 ccw(c59,0) v1@48.836,-5.381 ; v1@48.216,3.994 cw(c59,0) v1@48.836,5.381
  other v1: 48.4,-5.5 49.3,-5.5 48,-4.7 48.9,-4.7 31,-4 32,-4 47.7,-3.9 48.6,-3.9 31,-3 32,-3 31,-2 32,-2 47.1,-0.9 48,-0.9 47,0 48,0 47.1,0.9 48,0.9 31,2 32,2 31,3 32,3 47.7,3.9 48.6,3.9 31,4 32,4 48,4.7 48.9,4.7 48.4,5.5 49.3,5.5
T8S: pad.2@82.5,0 | length 50.7
  Top Layer w2: v1@69.164,-5.381 ccw(c59,0) v1@69.784,-3.994 ; v1@69.164,5.381 cw(c59,0) v1@69.784,3.994 ; v1@70.479,-0.702 ccw(c59,0) v1@70.479,0.702 ; v1@86.5,-4 v1@86.5,-2 ; v1@86.5,2 v1@86.5,4
  Mid-Layer 1 w2: v1@69.164,-5.381 ccw(c59,0) v1@69.784,-3.994 ; v1@69.164,5.381 cw(c59,0) v1@69.784,3.994 ; v1@70.479,-0.702 ccw(c59,0) v1@70.479,0.702 ; v1@86.5,-4 v1@86.5,-2 ; v1@86.5,2 v1@86.5,4
  Mid-Layer 2 w2: v1@69.164,-5.381 ccw(c59,0) v1@69.784,-3.994 ; v1@69.164,5.381 cw(c59,0) v1@69.784,3.994 ; v1@70.479,-0.702 ccw(c59,0) v1@70.479,0.702 ; v1@86.5,-4 v1@86.5,-2 ; v1@86.5,2 v1@86.5,4
  Mid-Layer 3 w2: v1@69.164,-5.381 ccw(c59,0) v1@69.784,-3.994 ; v1@69.164,5.381 cw(c59,0) v1@69.784,3.994 ; v1@70.479,-0.702 ccw(c59,0) v1@70.479,0.702 ; v1@86.5,-4 v1@86.5,-2 ; v1@86.5,2 v1@86.5,4
  Mid-Layer 4 w2: v1@69.164,-5.381 ccw(c59,0) v1@69.784,-3.994 ; v1@69.164,5.381 cw(c59,0) v1@69.784,3.994 ; v1@70.479,-0.702 ccw(c59,0) v1@70.479,0.702 ; v1@86.5,-4 v1@86.5,-2 ; v1@86.5,2 v1@86.5,4
  Bottom Layer w2: v1@69.164,-5.381 ccw(c59,0) v1@69.784,-3.994 ; v1@69.164,5.381 cw(c59,0) v1@69.784,3.994 ; v1@70.479,-0.702 ccw(c59,0) v1@70.479,0.702 ; v1@86.5,-4 v1@86.5,-2 ; v1@86.5,2 v1@86.5,4
  other v1: 68.7,-5.5 69.6,-5.5 69.1,-4.7 70,-4.7 86,-4 87,-4 69.4,-3.9 70.3,-3.9 86,-3 87,-3 86,-2 87,-2 70,-0.9 70.9,-0.9 70,0 71,0 70,0.9 70.9,0.9 86,2 87,2 86,3 87,3 69.4,3.9 70.3,3.9 86,4 87,4 69.1,4.7 70,4.7 68.7,5.5 69.6,5.5
T9P: "Primary    12-16.3" pad.2@94.5,0 | length 50.7
  Top Layer w2: v1@90.5,-4 v1@90.5,-2 ; v1@90.5,2 v1@90.5,4 ; v1@106.521,-0.702 cw(c118,0) v1@106.521,0.702 ; v1@107.216,-3.994 ccw(c118,0) v1@107.836,-5.381 ; v1@107.216,3.994 cw(c118,0) v1@107.836,5.381
  Mid-Layer 1 w2: v1@90.5,-4 v1@90.5,-2 ; v1@90.5,2 v1@90.5,4 ; v1@106.521,-0.702 cw(c118,0) v1@106.521,0.702 ; v1@107.216,-3.994 ccw(c118,0) v1@107.836,-5.381 ; v1@107.216,3.994 cw(c118,0) v1@107.836,5.381
  Mid-Layer 2 w2: v1@90.5,-4 v1@90.5,-2 ; v1@90.5,2 v1@90.5,4 ; v1@106.521,-0.702 cw(c118,0) v1@106.521,0.702 ; v1@107.216,-3.994 ccw(c118,0) v1@107.836,-5.381 ; v1@107.216,3.994 cw(c118,0) v1@107.836,5.381
  Mid-Layer 3 w2: v1@90.5,-4 v1@90.5,-2 ; v1@90.5,2 v1@90.5,4 ; v1@106.521,-0.702 cw(c118,0) v1@106.521,0.702 ; v1@107.216,-3.994 ccw(c118,0) v1@107.836,-5.381 ; v1@107.216,3.994 cw(c118,0) v1@107.836,5.381
  Mid-Layer 4 w2: v1@90.5,-4 v1@90.5,-2 ; v1@90.5,2 v1@90.5,4 ; v1@106.521,-0.702 cw(c118,0) v1@106.521,0.702 ; v1@107.216,-3.994 ccw(c118,0) v1@107.836,-5.381 ; v1@107.216,3.994 cw(c118,0) v1@107.836,5.381
  Bottom Layer w2: v1@90.5,-4 v1@90.5,-2 ; v1@90.5,2 v1@90.5,4 ; v1@106.521,-0.702 cw(c118,0) v1@106.521,0.702 ; v1@107.216,-3.994 ccw(c118,0) v1@107.836,-5.381 ; v1@107.216,3.994 cw(c118,0) v1@107.836,5.381
  other v1: 107.4,-5.5 108.3,-5.5 107,-4.7 107.9,-4.7 90,-4 91,-4 106.7,-3.9 107.6,-3.9 90,-3 91,-3 90,-2 91,-2 106.1,-0.9 107,-0.9 106,0 107,0 106.1,0.9 107,0.9 90,2 91,2 90,3 91,3 106.7,3.9 107.6,3.9 90,4 91,4 107,4.7 107.9,4.7 107.4,5.5 108.3,5.5
T9S: "Primary    12-16.8" pad.2@141.5,0 | length 50.7
  Top Layer w2: v1@128.164,-5.381 ccw(c118,0) v1@128.784,-3.994 ; v1@128.164,5.381 cw(c118,0) v1@128.784,3.994 ; v1@129.479,-0.702 ccw(c118,0) v1@129.479,0.702 ; v1@145.5,-4 v1@145.5,-2 ; v1@145.5,2 v1@145.5,4
  Mid-Layer 1 w2: v1@128.164,-5.381 ccw(c118,0) v1@128.784,-3.994 ; v1@128.164,5.381 cw(c118,0) v1@128.784,3.994 ; v1@129.479,-0.702 ccw(c118,0) v1@129.479,0.702 ; v1@145.5,-4 v1@145.5,-2 ; v1@145.5,2 v1@145.5,4
  Mid-Layer 2 w2: v1@128.164,-5.381 ccw(c118,0) v1@128.784,-3.994 ; v1@128.164,5.381 cw(c118,0) v1@128.784,3.994 ; v1@129.479,-0.702 ccw(c118,0) v1@129.479,0.702 ; v1@145.5,-4 v1@145.5,-2 ; v1@145.5,2 v1@145.5,4
  Mid-Layer 3 w2: v1@128.164,-5.381 ccw(c118,0) v1@128.784,-3.994 ; v1@128.164,5.381 cw(c118,0) v1@128.784,3.994 ; v1@129.479,-0.702 ccw(c118,0) v1@129.479,0.702 ; v1@145.5,-4 v1@145.5,-2 ; v1@145.5,2 v1@145.5,4
  Mid-Layer 4 w2: v1@128.164,-5.381 ccw(c118,0) v1@128.784,-3.994 ; v1@128.164,5.381 cw(c118,0) v1@128.784,3.994 ; v1@129.479,-0.702 ccw(c118,0) v1@129.479,0.702 ; v1@145.5,-4 v1@145.5,-2 ; v1@145.5,2 v1@145.5,4
  Bottom Layer w2: v1@128.164,-5.381 ccw(c118,0) v1@128.784,-3.994 ; v1@128.164,5.381 cw(c118,0) v1@128.784,3.994 ; v1@129.479,-0.702 ccw(c118,0) v1@129.479,0.702 ; v1@145.5,-4 v1@145.5,-2 ; v1@145.5,2 v1@145.5,4
  other v1: 127.7,-5.5 128.6,-5.5 128.1,-4.7 129,-4.7 145,-4 146,-4 128.4,-3.9 129.3,-3.9 145,-3 146,-3 145,-2 146,-2 129,-0.9 129.9,-0.9 129,0 130,0 129,0.9 129.9,0.9 145,2 146,2 145,3 146,3 128.4,3.9 129.3,3.9 145,4 146,4 128.1,4.7 129,4.7 127.7,5.5 128.6,5.5
pads on no net: "Primary 1-5.3" "Primary 1-5.8" "Primary 6-8.1" "Primary 6-8.3" "Primary 6-8.6" "Primary 6-8.8" "Primary 9-11.1" "Primary 9-11.3" "Primary 9-11.6" "Primary 9-11.8" "Primary    12-16.1" "Primary    12-16.6" "Secondary 1-3.1" "Secondary 1-3.3" "Secondary 1-3.6" "Secondary 1-3.8" "Secondary 4-9.1" "Secondary 4-9.3" "Secondary 4-9.6" "Secondary 4-9.8" "Secondary     10-12.1" "Secondary     10-12.3" "Secondary     10-12.6" "Secondary     10-12.8" "Shielding 2.1" "Shielding 2.3" "Shielding 2.6" "Shielding 2.8"

## Polygon pours and split planes (outlines as drawn)
T9S on Mid-Layer 1 "T9S_L02_P067" (solid, remove dead copper, pour order 67): 89,-13 101.5,-13 101.5,-18.5 134.5,-18.5 134.5,-13 147,-13 147,13 134.5,13 134.5,18.5 101.5,18.5 101.5,13 89,13
T8P on Mid-Layer 1 "T8P_L02_P059" (solid, remove dead copper, pour order 59): 88,13 75.5,13 75.5,18.5 42.5,18.5 42.5,13 30,13 30,-13 42.5,-13 42.5,-18.5 75.5,-18.5 75.5,-13 88,-13
T6P on Mid-Layer 1 "T6P_L02_P053" (solid, remove dead copper, pour order 53): 147,52 134.5,52 134.5,57.5 101.5,57.5 101.5,52 89,52 89,26 101.5,26 101.5,20.5 134.5,20.5 134.5,26 147,26
T4P on Mid-Layer 1 "T4P_L02_P047" (solid, remove dead copper, pour order 47): 29,52 16.5,52 16.5,57.5 -16.5,57.5 -16.5,52 -29,52 -29,26 -16.5,26 -16.5,20.5 16.5,20.5 16.5,26 29,26
T7S on Mid-Layer 1 "T7S_L02_P035" (solid, remove dead copper, pour order 35): -29,-13 -16.5,-13 -16.5,-18.5 16.5,-18.5 16.5,-13 29,-13 29,13 16.5,13 16.5,18.5 -16.5,18.5 -16.5,13 -29,13
T5S on Mid-Layer 1 "T5S_L02_P029" (solid, remove dead copper, pour order 29): 30,26 42.5,26 42.5,20.5 75.5,20.5 75.5,26 88,26 88,52 75.5,52 75.5,57.5 42.5,57.5 42.5,52 30,52
T3S on Mid-Layer 1 "T3S_L02_P023" (solid, remove dead copper, pour order 23): 89,65 101.5,65 101.5,59.5 134.5,59.5 134.5,65 147,65 147,91 134.5,91 134.5,96.5 101.5,96.5 101.5,91 89,91
T2P on Mid-Layer 1 "T2P_L02_P015" (solid, remove dead copper, pour order 15): 88,91 75.5,91 75.5,96.5 42.5,96.5 42.5,91 30,91 30,65 42.5,65 42.5,59.5 75.5,59.5 75.5,65 88,65
T1P on Mid-Layer 1 "T1P_L02_P000" (solid, remove dead copper, pour order 0): 29,91 16.5,91 16.5,96.5 -16.5,96.5 -16.5,91 -29,91 -29,65 -16.5,65 -16.5,59.5 16.5,59.5 16.5,65 29,65
T1P on Mid-Layer 2 "T1P_L03_P001" (solid, remove dead copper, pour order 1): 29,91 16.5,91 16.5,96.5 -16.5,96.5 -16.5,91 -29,91 -29,65 -16.5,65 -16.5,59.5 16.5,59.5 16.5,65 29,65
T9P on Mid-Layer 3 "T9P_L04_P069" (solid, remove dead copper, pour order 69): 147,13 134.5,13 134.5,18.5 101.5,18.5 101.5,13 89,13 89,-13 101.5,-13 101.5,-18.5 134.5,-18.5 134.5,-13 147,-13
T8S on Mid-Layer 3 "T8S_L04_P062" (solid, remove dead copper, pour order 62): 30,-13 42.5,-13 42.5,-18.5 75.5,-18.5 75.5,-13 88,-13 88,13 75.5,13 75.5,18.5 42.5,18.5 42.5,13 30,13
T6S on Mid-Layer 3 "T6S_L04_P056" (solid, remove dead copper, pour order 56): 89,26 101.5,26 101.5,20.5 134.5,20.5 134.5,26 147,26 147,52 134.5,52 134.5,57.5 101.5,57.5 101.5,52 89,52
T4S on Mid-Layer 3 "T4S_L04_P050" (solid, remove dead copper, pour order 50): -29,26 -16.5,26 -16.5,20.5 16.5,20.5 16.5,26 29,26 29,52 16.5,52 16.5,57.5 -16.5,57.5 -16.5,52 -29,52
T7P on Mid-Layer 3 "T7P_L04_P036" (solid, remove dead copper, pour order 36): 29,13 16.5,13 16.5,18.5 -16.5,18.5 -16.5,13 -29,13 -29,-13 -16.5,-13 -16.5,-18.5 16.5,-18.5 16.5,-13 29,-13
T5P on Mid-Layer 3 "T5P_L04_P030" (solid, remove dead copper, pour order 30): 88,52 75.5,52 75.5,57.5 42.5,57.5 42.5,52 30,52 30,26 42.5,26 42.5,20.5 75.5,20.5 75.5,26 88,26
T3P on Mid-Layer 3 "T3P_L04_P024" (solid, remove dead copper, pour order 24): 147,91 134.5,91 134.5,96.5 101.5,96.5 101.5,91 89,91 89,65 101.5,65 101.5,59.5 134.5,59.5 134.5,65 147,65
T2S on Mid-Layer 3 "T2S_L04_P020" (solid, remove dead copper, pour order 20): 30,65 42.5,65 42.5,59.5 75.5,59.5 75.5,65 88,65 88,91 75.5,91 75.5,96.5 42.5,96.5 42.5,91 30,91
T1P on Mid-Layer 3 "T1P_L04_P002" (solid, remove dead copper, pour order 2): 29,91 16.5,91 16.5,96.5 -16.5,96.5 -16.5,91 -29,91 -29,65 -16.5,65 -16.5,59.5 16.5,59.5 16.5,65 29,65
T8S on Bottom Layer "T8S_L06_P064" (solid, remove dead copper, pour order 64): 88,-6.5 88,6.5 81.5,6.5 81.5,-6.5
T8P on Bottom Layer "T8P_L06_P063" (solid, remove dead copper, pour order 63): 80.5,-13 75.5,-13 75.5,-18.5 42.5,-18.5 42.5,-13 30,-13 30,13 42.5,13 42.5,18.5 75.5,18.5 75.5,13 80.5,13
T6S on Bottom Layer "T6S_L06_P055" (solid, remove dead copper, pour order 55): 147,32.5 147,45.5 140.5,45.5 140.5,32.5
T6P on Bottom Layer "T6P_L06_P054" (solid, remove dead copper, pour order 54): 139.5,26 134.5,26 134.5,20.5 101.5,20.5 101.5,26 89,26 89,52 101.5,52 101.5,57.5 134.5,57.5 134.5,52 139.5,52
T4S on Bottom Layer "T4S_L06_P049" (solid, remove dead copper, pour order 49): 29,32.5 29,45.5 22.5,45.5 22.5,32.5
T4P on Bottom Layer "T4P_L06_P048" (solid, remove dead copper, pour order 48): 21.5,26 16.5,26 16.5,20.5 -16.5,20.5 -16.5,26 -29,26 -29,52 -16.5,52 -16.5,57.5 16.5,57.5 16.5,52 21.5,52
T7P on Bottom Layer "T7P_L06_P038" (solid, remove dead copper, pour order 38): -29,6.5 -29,-6.5 -22.5,-6.5 -22.5,6.5
T7S on Bottom Layer "T7S_L06_P037" (solid, remove dead copper, pour order 37): -21.5,13 -16.5,13 -16.5,18.5 16.5,18.5 16.5,13 29,13 29,-13 16.5,-13 16.5,-18.5 -16.5,-18.5 -16.5,-13 -21.5,-13
T5P on Bottom Layer "T5P_L06_P032" (solid, remove dead copper, pour order 32): 30,45.5 30,32.5 36.5,32.5 36.5,45.5
T5S on Bottom Layer "T5S_L06_P031" (solid, remove dead copper, pour order 31): 37.5,52 42.5,52 42.5,57.5 75.5,57.5 75.5,52 88,52 88,26 75.5,26 75.5,20.5 42.5,20.5 42.5,26 37.5,26
T3P on Bottom Layer "T3P_L06_P026" (solid, remove dead copper, pour order 26): 89,84.5 89,71.5 95.5,71.5 95.5,84.5
T3S on Bottom Layer "T3S_L06_P025" (solid, remove dead copper, pour order 25): 96.5,91 101.5,91 101.5,96.5 134.5,96.5 134.5,91 147,91 147,65 134.5,65 134.5,59.5 101.5,59.5 101.5,65 96.5,65
T2S on Bottom Layer "T2S_L06_P017" (solid, remove dead copper, pour order 17): 88,71.5 88,84.5 81.5,84.5 81.5,71.5
T2P on Bottom Layer "T2P_L06_P016" (solid, remove dead copper, pour order 16): 80.5,65 75.5,65 75.5,59.5 42.5,59.5 42.5,65 30,65 30,91 42.5,91 42.5,96.5 75.5,96.5 75.5,91 80.5,91
T1S on Bottom Layer "T1S_L06_P008" (solid, remove dead copper, pour order 8): -21.5,65 -16.5,65 -16.5,59.5 16.5,59.5 16.5,65 29,65 29,91 16.5,91 16.5,96.5 -16.5,96.5 -16.5,91 -21.5,91
T1P on Bottom Layer "T1P_L06_P005" (solid, remove dead copper, pour order 5): -29,71.5 -29,84.5 -22.5,84.5 -22.5,71.5
T9S on Top Layer "T9S_L01_P066" (solid, remove dead copper, pour order 66): 147,6.5 147,-6.5 140.5,-6.5 140.5,6.5
T9P on Top Layer "T9P_L01_P065" (solid, remove dead copper, pour order 65): 89,6.5 110,6.5 110,-6.5 89,-6.5
T8P on Top Layer "T8P_L01_P058" (solid, remove dead copper, pour order 58): 30,6.5 30,-6.5 36.5,-6.5 36.5,6.5
T8S on Top Layer "T8S_L01_P057" (solid, remove dead copper, pour order 57): 88,6.5 67,6.5 67,-6.5 88,-6.5
T6P on Top Layer "T6P_L01_P052" (solid, remove dead copper, pour order 52): 89,45.5 89,32.5 95.5,32.5 95.5,45.5
T6S on Top Layer "T6S_L01_P051" (solid, remove dead copper, pour order 51): 147,45.5 126,45.5 126,32.5 147,32.5
T4P on Top Layer "T4P_L01_P046" (solid, remove dead copper, pour order 46): -29,45.5 -29,32.5 -22.5,32.5 -22.5,45.5
T4S on Top Layer "T4S_L01_P045" (solid, remove dead copper, pour order 45): 29,45.5 8,45.5 8,32.5 29,32.5
T7S on Top Layer "T7S_L01_P034" (solid, remove dead copper, pour order 34): 29,6.5 29,-6.5 22.5,-6.5 22.5,6.5
T7P on Top Layer "T7P_L01_P033" (solid, remove dead copper, pour order 33): -29,6.5 -8,6.5 -8,-6.5 -29,-6.5
T5S on Top Layer "T5S_L01_P028" (solid, remove dead copper, pour order 28): 88,45.5 88,32.5 81.5,32.5 81.5,45.5
T5P on Top Layer "T5P_L01_P027" (solid, remove dead copper, pour order 27): 30,45.5 51,45.5 51,32.5 30,32.5
T3S on Top Layer "T3S_L01_P022" (solid, remove dead copper, pour order 22): 147,84.5 147,71.5 140.5,71.5 140.5,84.5
T3P on Top Layer "T3P_L01_P021" (solid, remove dead copper, pour order 21): 89,84.5 110,84.5 110,71.5 89,71.5
T2P on Top Layer "T2P_L01_P012" (solid, remove dead copper, pour order 12): 30,84.5 30,71.5 36.5,71.5 36.5,84.5
T2S on Top Layer "T2S_L01_P011" (solid, remove dead copper, pour order 11): 88,84.5 67,84.5 67,71.5 88,71.5
T9P on Mid-Layer 4 "T9P_L05_P068" (solid, remove dead copper, pour order 68): 147,13 134.5,13 134.5,18.5 101.5,18.5 101.5,13 89,13 89,-13 101.5,-13 101.5,-18.5 134.5,-18.5 134.5,-13 147,-13

## Keep-outs
Top Layer:
  circle w1: c93,-10 r3.5
  circle w1: c143,10 r3.5
  circle w1: c143,-10 r3.5
  circle w1: c93,10 r3.5
  circle w1: c34,-10 r3.5
  circle w1: c84,10 r3.5
  circle w1: c84,-10 r3.5
  circle w1: c34,10 r3.5
  circle w1: c93,29 r3.5
  circle w1: c143,49 r3.5
  circle w1: c143,29 r3.5
  circle w1: c93,49 r3.5
  circle w1: c-25,29 r3.5
  circle w1: c25,49 r3.5
  circle w1: c25,29 r3.5
  circle w1: c-25,49 r3.5
  circle w1: c-25,10 r3.5
  circle w1: c25,-10 r3.5
  circle w1: c25,10 r3.5
  circle w1: c-25,-10 r3.5
  circle w1: c34,49 r3.5
  circle w1: c84,29 r3.5
  circle w1: c84,49 r3.5
  circle w1: c34,29 r3.5
  circle w1: c93,68 r3.5
  circle w1: c143,88 r3.5
  circle w1: c143,68 r3.5
  circle w1: c93,88 r3.5
  circle w1: c34,88 r3.5
  circle w1: c84,68 r3.5
  circle w1: c84,88 r3.5
  circle w1: c34,68 r3.5
  circle w1: c-25,68 r3.5
  circle w1: c25,88 r3.5
  circle w1: c25,68 r3.5
  circle w1: c-25,88 r3.5
  lines w1: -29,-6.5 -25,-6.5 ; -29,6.5 -25,6.5 ; -29,32.5 -25,32.5 ; -29,45.5 -25,45.5 ; -29,71.5 -25,71.5 ; -29,84.5 -25,84.5 ; -26,-6.5 -26,6.5 ; -21.5,-14 -21.5,-10 ; -21.5,10 -21.5,14 ; -21.5,25 -21.5,29 ; -21.5,49 -21.5,53 ; -21.5,64 -21.5,68 ; -21.5,88 -21.5,92 ; 21.5,-14 21.5,-10 ; 21.5,10 21.5,14 ; 21.5,25 21.5,29 ; 21.5,49 21.5,53 ; 21.5,64 21.5,68 ; 21.5,88 21.5,92 ; 25,-6.5 29,-6.5 ; 25,6.5 29,6.5 ; 25,32.5 29,32.5 ; 25,45.5 29,45.5 ; 25,71.5 29,71.5 ; 25,84.5 29,84.5 ; 26,32.5 26,45.5 ; 30,-6.5 34,-6.5 ; 30,6.5 34,6.5 ; 30,32.5 34,32.5 ; 30,45.5 34,45.5 ; 30,71.5 34,71.5 ; 30,84.5 34,84.5 ; 33,32.5 33,45.5 ; 37.5,-14 37.5,-10 ; 37.5,10 37.5,14 ; 37.5,25 37.5,29 ; 37.5,49 37.5,53 ; 37.5,64 37.5,68 ; 37.5,88 37.5,92 ; 80.5,-14 80.5,-10 ; 80.5,10 80.5,14 ; 80.5,25 80.5,29 ; 80.5,49 80.5,53 ; 80.5,64 80.5,68 ; 80.5,88 80.5,92 ; 84,-6.5 88,-6.5 ; 84,6.5 88,6.5 ; 84,32.5 88,32.5 ; 84,45.5 88,45.5 ; 84,71.5 88,71.5 ; 84,84.5 88,84.5 ; 85,-6.5 85,6.5 ; 85,71.5 85,84.5 ; 89,-6.5 93,-6.5 ; 89,6.5 93,6.5 ; 89,32.5 93,32.5 ; 89,45.5 93,45.5 ; 89,71.5 93,71.5 ; 89,84.5 93,84.5 ; 92,-6.5 92,6.5 ; 92,71.5 92,84.5 ; 96.5,-14 96.5,-10 ; 96.5,10 96.5,14 ; 96.5,25 96.5,29 ; 96.5,49 96.5,53 ; 96.5,64 96.5,68 ; 96.5,88 96.5,92 ; 139.5,-14 139.5,-10 ; 139.5,10 139.5,14 ; 139.5,25 139.5,29 ; 139.5,49 139.5,53 ; 139.5,64 139.5,68 ; 139.5,88 139.5,92 ; 143,-6.5 147,-6.5 ; 143,6.5 147,6.5 ; 143,32.5 147,32.5 ; 143,45.5 147,45.5 ; 143,71.5 147,71.5 ; 143,84.5 147,84.5 ; 144,32.5 144,45.5
  lines w3: -27.5,-5.5 -27.5,5.5 ; 27.5,33.5 27.5,44.5 ; 31.5,33.5 31.5,44.5 ; 86.5,-5.5 86.5,5.5 ; 86.5,72.5 86.5,83.5 ; 90.5,-5.5 90.5,5.5 ; 90.5,72.5 90.5,83.5 ; 145.5,33.5 145.5,44.5
Mid-Layer 1:
  circle w1: c93,10 r3.5
  circle w1: c93,-10 r3.5
  circle w1: c143,-10 r3.5
  circle w1: c84,-10 r3.5
  circle w1: c84,10 r3.5
  circle w1: c34,-10 r3.5
  circle w1: c34,10 r3.5
  circle w1: c143,29 r3.5
  circle w1: c143,49 r3.5
  circle w1: c93,29 r3.5
  circle w1: c93,49 r3.5
  circle w1: c25,29 r3.5
  circle w1: c25,49 r3.5
  circle w1: c-25,29 r3.5
  circle w1: c-25,49 r3.5
  circle w1: c25,-10 r3.5
  circle w1: c25,10 r3.5
  circle w1: c-25,-10 r3.5
  circle w1: c-25,10 r3.5
  circle w1: c84,29 r3.5
  circle w1: c84,49 r3.5
  circle w1: c34,29 r3.5
  circle w1: c34,49 r3.5
  circle w1: c93,88 r3.5
  circle w1: c93,68 r3.5
  circle w1: c143,88 r3.5
  circle w1: c143,68 r3.5
  circle w1: c34,88 r3.5
  circle w1: c34,68 r3.5
  circle w1: c84,88 r3.5
  circle w1: c84,68 r3.5
  circle w1: c25,68 r3.5
  circle w1: c25,88 r3.5
  circle w1: c-25,68 r3.5
  lines w1: -29,-6.5 -25,-6.5 ; -29,6.5 -25,6.5 ; -29,32.5 -25,32.5 ccw(c-25,39.5) -18,39.5 -18,42.25 cw(c-14,42.25) -14,46.25 -5.25,46.25 ; -29,45.5 -25,45.5 ; -29,71.5 -25,71.5 ; -29,84.5 -25,84.5 ccw(c-25,88) -22.525,85.525 ; -26,71.5 -26,84.5 ; -22.5,85.5 -5,85.5 ; -21.5,-14 -21.5,-10 ; -21.5,10 -21.5,14 ; -21.5,25 -21.5,29 ; -21.5,49 -21.5,53 ; -21.5,64 -21.5,68 ; -11,-19.053 cw(c0,0) -11,19.053 ; 5.25,-7.25 14,-7.25 ccw(c14,-3.25) 18,-3.25 18,-0.5 cw(c25,-0.5) 25,6.5 29,6.5 ; 11,19.947 ccw(c0,39) 11,58.053 ; 11,58.947 ccw(c0,78) 11,97.053 ; 21.5,-14 21.5,-10 ; 21.5,10 21.5,14 ; 21.5,25 21.5,29 ; 21.5,49 21.5,53 ; 21.5,64 21.5,68 ; 21.5,88 21.5,92 ; 25,-6.5 29,-6.5 ; 25,32.5 29,32.5 ; 25,45.5 29,45.5 ; 25,71.5 29,71.5 ; 25,84.5 29,84.5 ; 30,-6.5 34,-6.5 ccw(c34,0.5) 41,0.5 41,3.25 cw(c45,3.25) 45,7.25 53.75,7.25 ; 30,6.5 34,6.5 ; 30,32.5 34,32.5 ; 30,45.5 34,45.5 ; 30,71.5 34,71.5 ccw(c34,78.5) 41,78.5 41,81.25 cw(c45,81.25) 45,85.25 53.75,85.25 ; 30,84.5 34,84.5 ; 37.5,-14 37.5,-10 ; 37.5,10 37.5,14 ; 37.5,25 37.5,29 ; 37.5,49 37.5,53 ; 37.5,64 37.5,68 ; 37.5,88 37.5,92 ; 48,19.947 cw(c59,39) 48,58.053 ; 64.25,31.75 73,31.75 ccw(c73,35.75) 77,35.75 77,38.5 cw(c84,38.5) 84,45.5 88,45.5 ; 70,-19.053 ccw(c59,0) 70,19.053 ; 70,58.947 ccw(c59,78) 70,97.053 ; 80.5,-14 80.5,-10 ; 80.5,10 80.5,14 ; 80.5,25 80.5,29 ; 80.5,49 80.5,53 ; 80.5,64 80.5,68 ; 80.5,88 80.5,92 ; 84,-6.5 88,-6.5 ; 84,6.5 88,6.5 ; 84,32.5 88,32.5 ; 84,71.5 88,71.5 ; 84,84.5 88,84.5 ; 89,-6.5 93,-6.5 ; 89,6.5 93,6.5 ; 89,32.5 93,32.5 ccw(c93,39.5) 100,39.5 100,42.25 cw(c104,42.25) 104,46.25 112.75,46.25 ; 89,45.5 93,45.5 ; 89,71.5 93,71.5 ; 89,84.5 93,84.5 ; 96.5,-14 96.5,-10 ; 96.5,10 96.5,14 ; 96.5,25 96.5,29 ; 96.5,49 96.5,53 ; 96.5,64 96.5,68 ; 96.5,88 96.5,92 ; 107,-19.053 cw(c118,0) 107,19.053 ; 107,58.947 cw(c118,78) 107,97.053 ; 123,7.5 140.5,7.5 ; 123.25,70.75 132,70.75 ccw(c132,74.75) 136,74.75 136,77.5 cw(c143,77.5) 143,84.5 147,84.5 ; 129,19.947 ccw(c118,39) 129,58.053 ; 139.5,-14 139.5,-10 ; 139.5,25 139.5,29 ; 139.5,49 139.5,53 ; 139.5,64 139.5,68 ; 139.5,88 139.5,92 ; 140.525,7.525 ccw(c143,10) 143,6.5 147,6.5 ; 143,-6.5 147,-6.5 ; 143,32.5 147,32.5 ; 143,45.5 147,45.5 ; 143,71.5 147,71.5
  lines w3: -27.5,72.5 -27.5,83.5 ; -11.456,79.002 ccw(c0,78) -9.959,72.25
  lines w4: -9.959,-5.75 cw(c0,0) -9.959,5.75 ; 9.959,33.25 ccw(c0,39) 9.959,44.75 ; 49.041,33.25 cw(c59,39) 49.041,44.75 ; 68.959,-5.75 ccw(c59,0) 68.959,5.75 ; 68.959,72.25 ccw(c59,78) 68.959,83.75 ; 108.041,-5.75 cw(c118,0) 108.041,5.75 ; 108.041,72.25 cw(c118,78) 108.041,83.75 ; 127.959,-5.75 ccw(c118,0) 127.959,5.75 ; 127.959,33.25 ccw(c118,39) 127.959,44.75
Mid-Layer 2:
  circle w1: c93,-10 r3.5
  circle w1: c93,10 r3.5
  circle w1: c143,-10 r3.5
  circle w1: c143,10 r3.5
  circle w1: c84,10 r3.5
  circle w1: c84,-10 r3.5
  circle w1: c34,10 r3.5
  circle w1: c34,-10 r3.5
  circle w1: c143,49 r3.5
  circle w1: c143,29 r3.5
  circle w1: c93,49 r3.5
  circle w1: c93,29 r3.5
  circle w1: c25,49 r3.5
  circle w1: c25,29 r3.5
  circle w1: c-25,49 r3.5
  circle w1: c-25,29 r3.5
  circle w1: c25,10 r3.5
  circle w1: c25,-10 r3.5
  circle w1: c-25,10 r3.5
  circle w1: c-25,-10 r3.5
  circle w1: c84,49 r3.5
  circle w1: c84,29 r3.5
  circle w1: c34,49 r3.5
  circle w1: c34,29 r3.5
  circle w1: c93,68 r3.5
  circle w1: c93,88 r3.5
  circle w1: c143,68 r3.5
  circle w1: c143,88 r3.5
  circle w1: c34,68 r3.5
  circle w1: c34,88 r3.5
  circle w1: c84,68 r3.5
  circle w1: c84,88 r3.5
  circle w1: c25,88 r3.5
  circle w1: c25,68 r3.5
  circle w1: c-25,88 r3.5
  circle w1: c-25,68 r3.5
  lines w1: -29,-6.5 -25,-6.5 ; -29,6.5 -25,6.5 ; -29,32.5 -25,32.5 ; -29,45.5 -25,45.5 ; -29,71.5 -25,71.5 ; -29,78 -26,78 -26,71.5 ; -29,84.5 -25,84.5 ; -21.5,-14 -21.5,-10 ; -21.5,10 -21.5,14 ; -21.5,25 -21.5,29 ; -21.5,49 -21.5,53 ; -21.5,64 -21.5,68 ; -21.5,87.75 -21.5,83.75 ccw(c-18,83.75) -18,80.25 -9.25,80.25 ; -21.5,88 -21.5,92 ; 11,58.947 ccw(c0,78) 11,97.053 ; 21.5,-14 21.5,-10 ; 21.5,10 21.5,14 ; 21.5,25 21.5,29 ; 21.5,49 21.5,53 ; 21.5,64 21.5,68 ; 21.5,88 21.5,92 ; 25,-6.5 29,-6.5 ; 25,6.5 29,6.5 ; 25,32.5 29,32.5 ; 25,45.5 29,45.5 ; 25,71.5 29,71.5 ; 25,84.5 29,84.5 ; 30,-6.5 34,-6.5 ; 30,6.5 34,6.5 ; 30,32.5 34,32.5 ; 30,45.5 34,45.5 ; 30,71.5 34,71.5 ; 30,84.5 34,84.5 ; 37.5,-14 37.5,-10 ; 37.5,10 37.5,14 ; 37.5,25 37.5,29 ; 37.5,49 37.5,53 ; 37.5,64 37.5,68 ; 37.5,88 37.5,92 ; 80.5,-14 80.5,-10 ; 80.5,10 80.5,14 ; 80.5,25 80.5,29 ; 80.5,49 80.5,53 ; 80.5,64 80.5,68 ; 80.5,88 80.5,92 ; 84,-6.5 88,-6.5 ; 84,6.5 88,6.5 ; 84,32.5 88,32.5 ; 84,45.5 88,45.5 ; 84,71.5 88,71.5 ; 84,84.5 88,84.5 ; 89,-6.5 93,-6.5 ; 89,6.5 93,6.5 ; 89,32.5 93,32.5 ; 89,45.5 93,45.5 ; 89,71.5 93,71.5 ; 89,84.5 93,84.5 ; 96.5,-14 96.5,-10 ; 96.5,10 96.5,14 ; 96.5,25 96.5,29 ; 96.5,49 96.5,53 ; 96.5,64 96.5,68 ; 96.5,88 96.5,92 ; 139.5,-14 139.5,-10 ; 139.5,10 139.5,14 ; 139.5,25 139.5,29 ; 139.5,49 139.5,53 ; 139.5,64 139.5,68 ; 139.5,88 139.5,92 ; 143,-6.5 147,-6.5 ; 143,6.5 147,6.5 ; 143,32.5 147,32.5 ; 143,45.5 147,45.5 ; 143,71.5 147,71.5 ; 143,84.5 147,84.5
  lines w3: -27.5,72.5 -27.5,77 ; -11.456,79.002 ccw(c0,78) -9.959,72.25